# Altium PCB 388D_Control_v1_PCB1_harry.PcbDoc (part 1 of 5)
Units mil, origin at the board's own origin, x right, y up, seen from the top; angles counter-clockwise.
Board outline 4800 x 4000 mil, 6 copper layers (Top Layer, Singal Layer 2, Signal layer 3, Signal Layer 4, Signal Layer 5, Bottom Layer), stack 32.7 mil thick; 431 components, 469 nets, 2000 pads, 719 vias.
Unrouted connection lines stored in the file: 971.
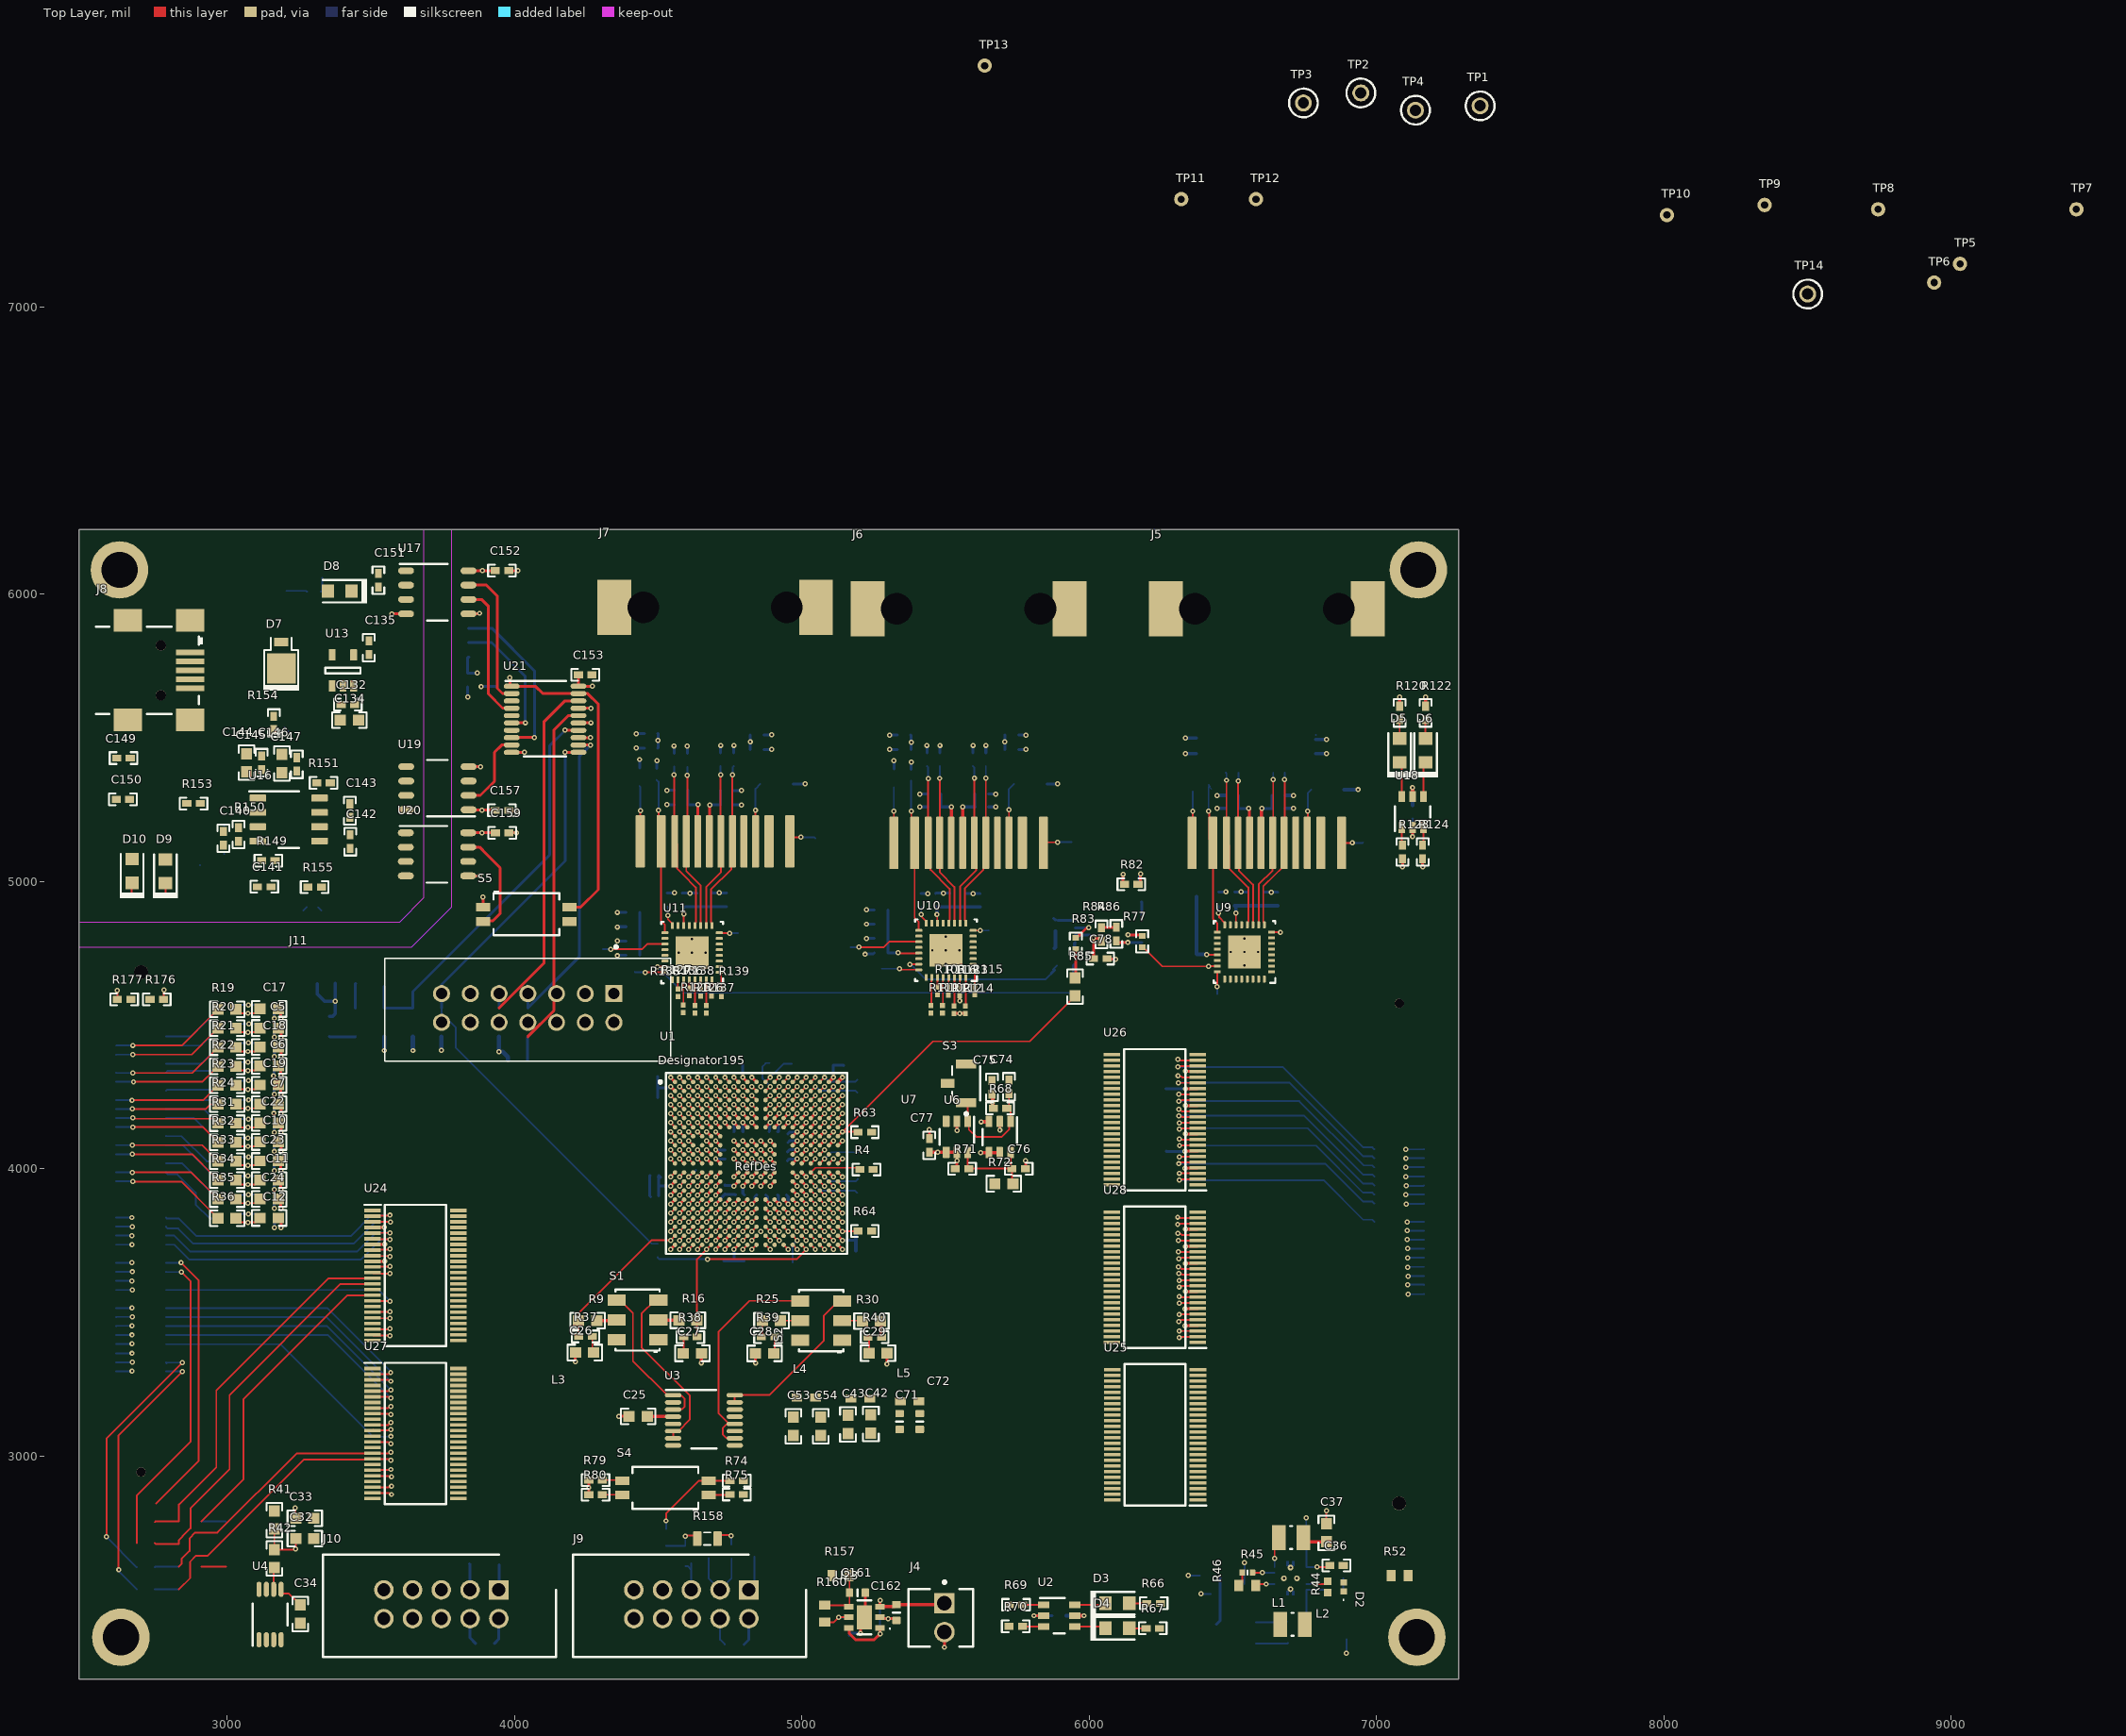
[diagram p0: Top Layer view]
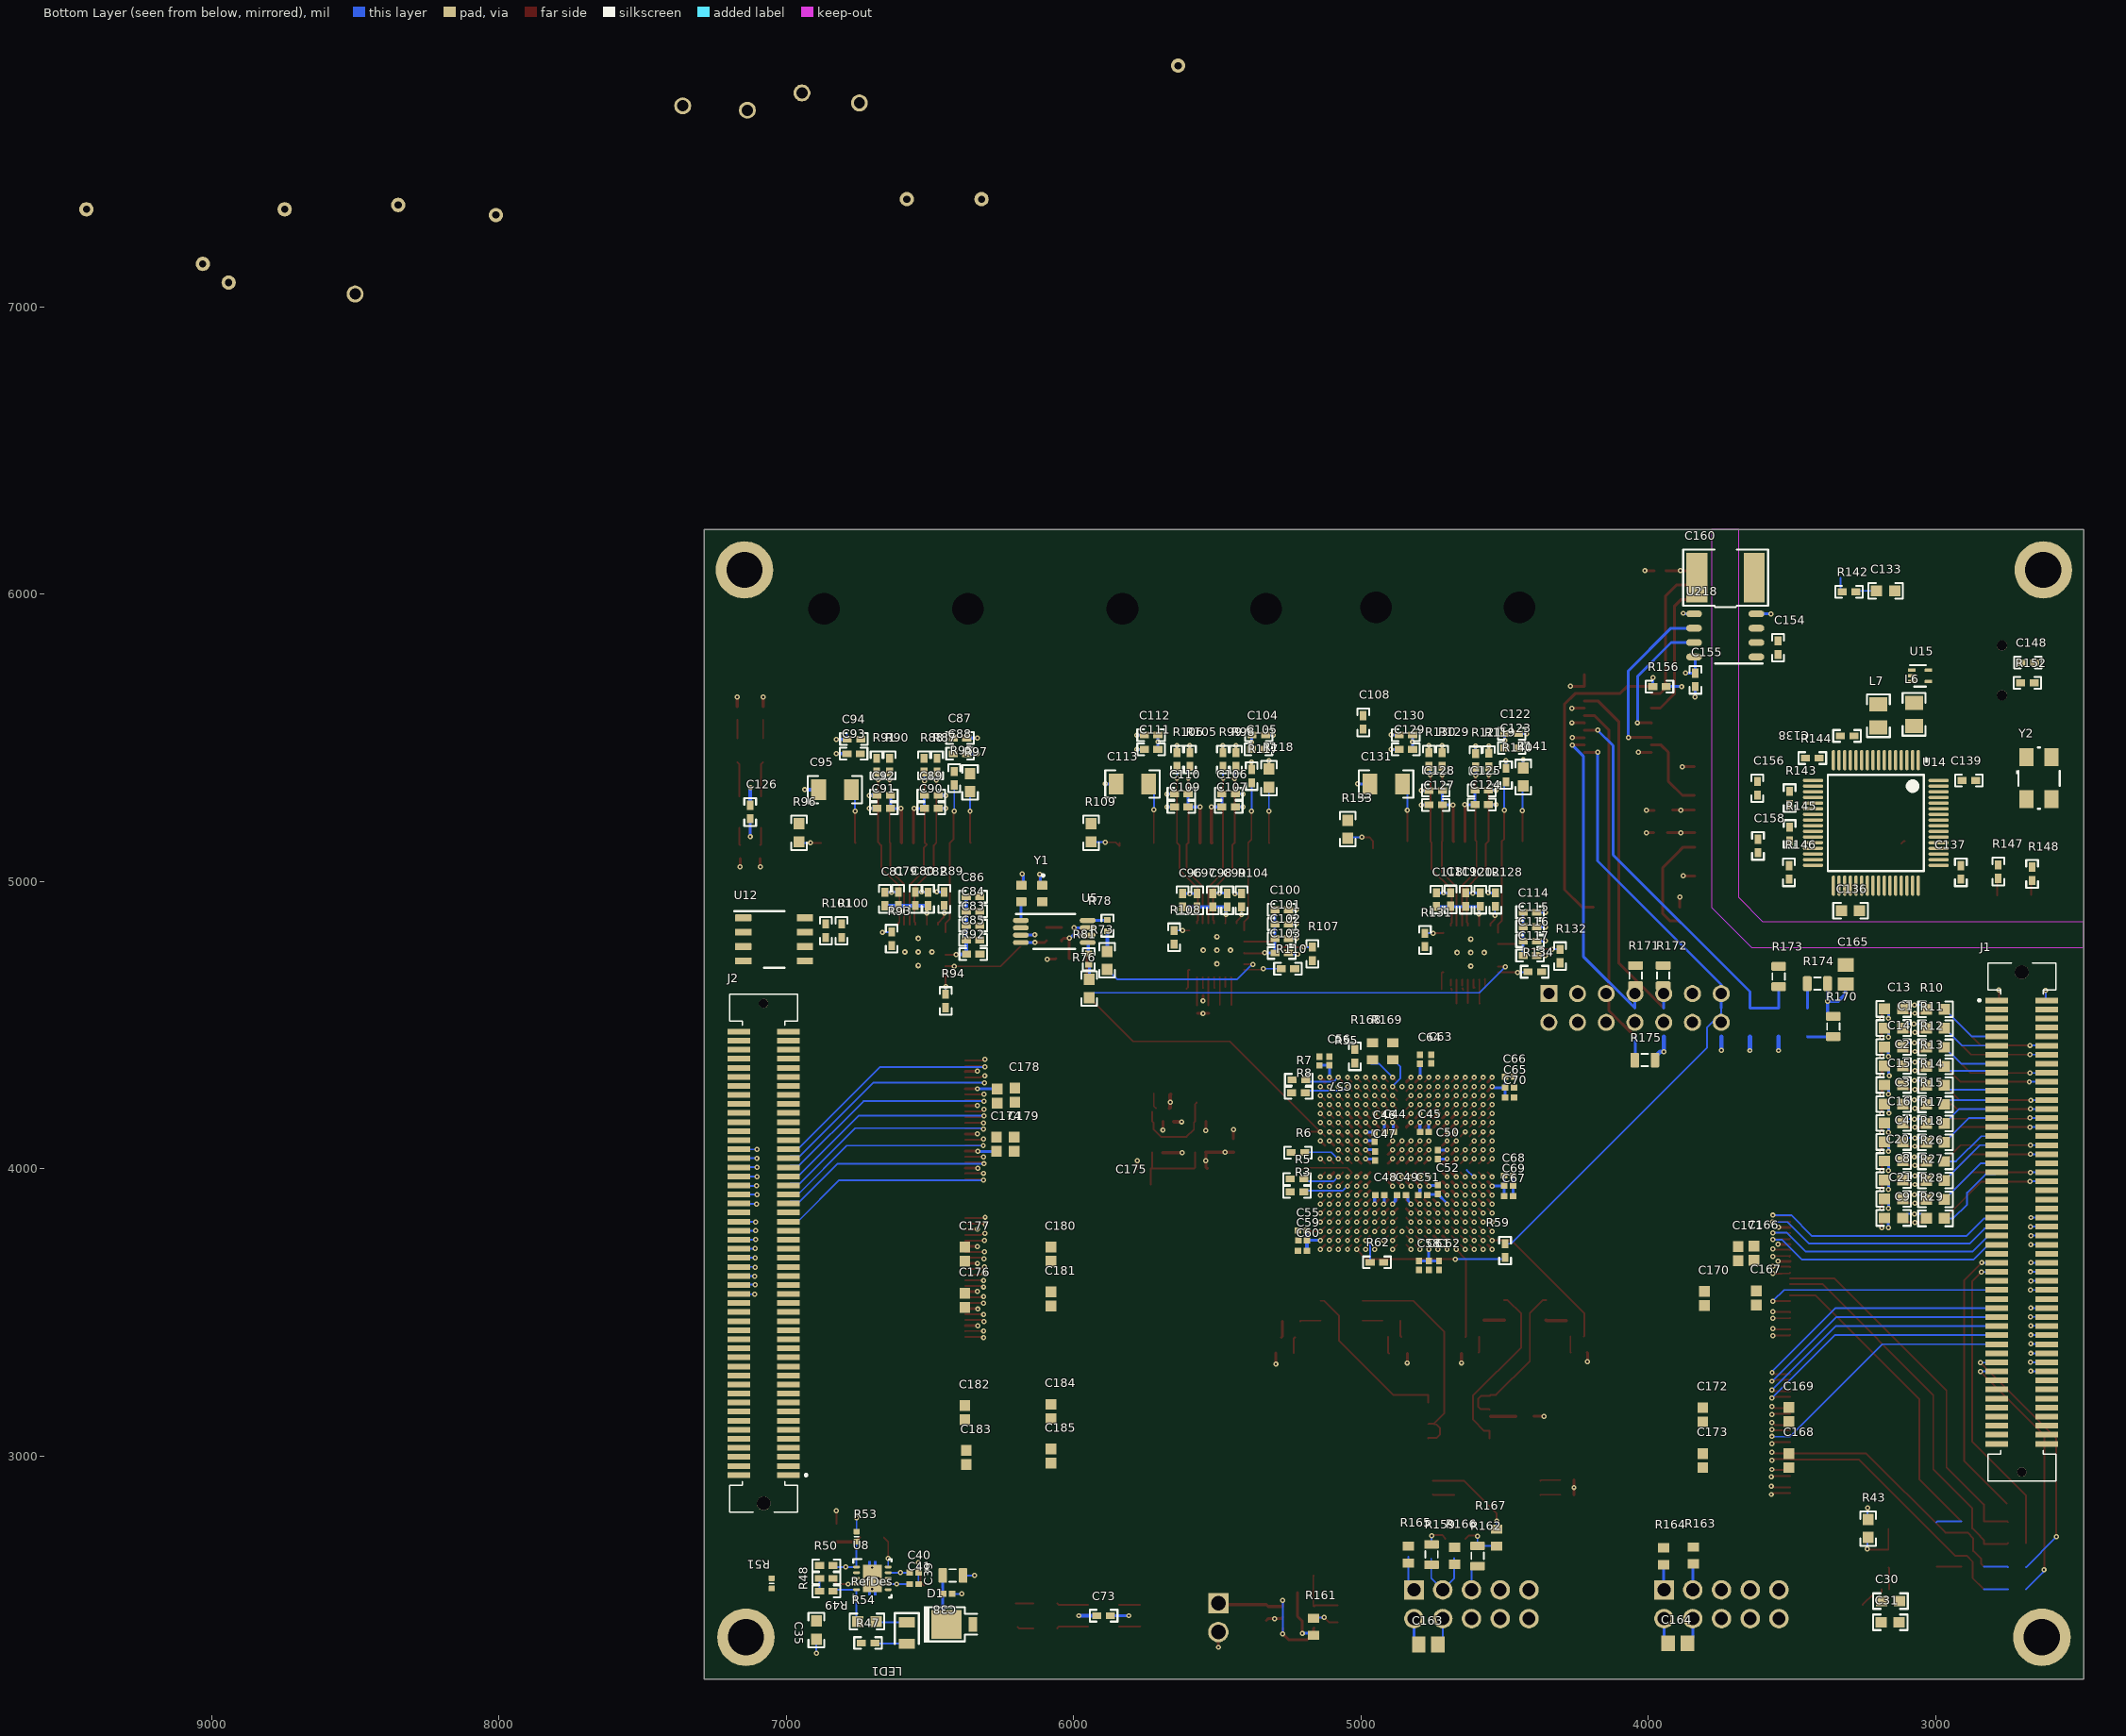
[diagram p1: Bottom Layer view, seen from below]
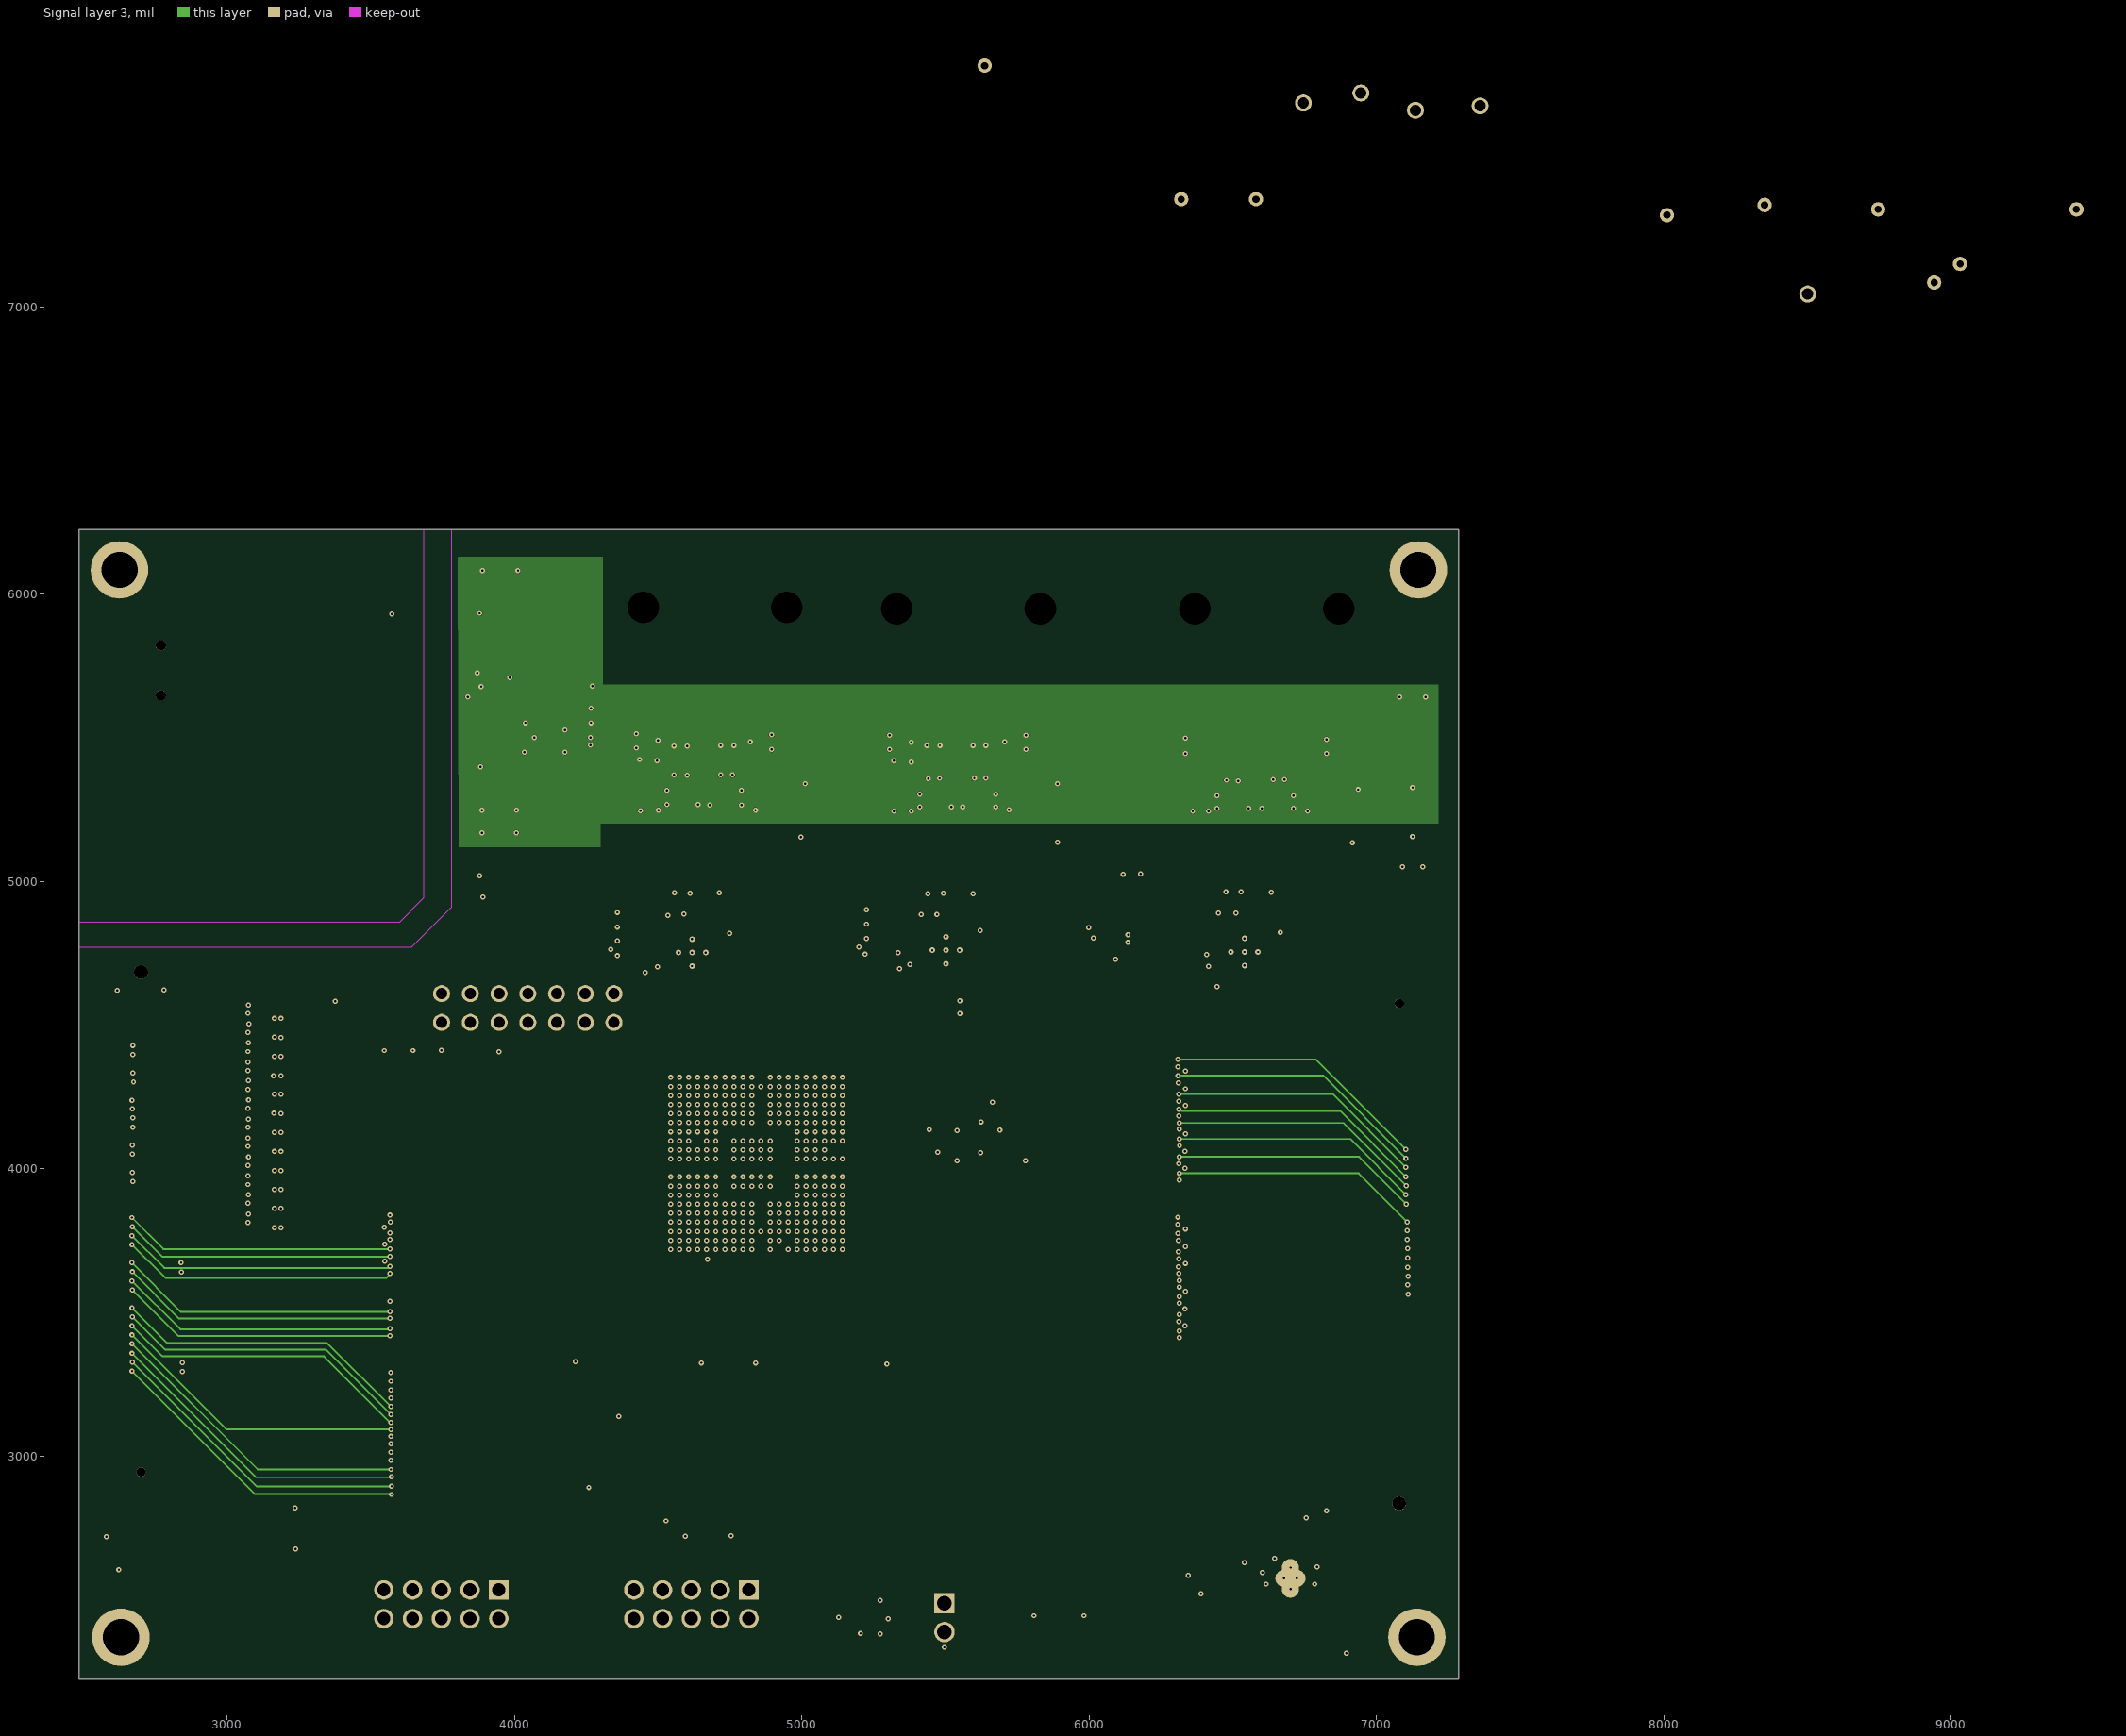
[diagram p2: Signal layer 3]

## Layer stack, top to bottom
Top Solder: solder mask 0.8, Solder Resist, Dk 3.5
Top Layer: signal copper 1.45
Dielectric 1: prepreg 5, FR-4, Dk 4.1
Singal Layer 2: signal copper 1.2
Dielectric 2: core 5, FR-4, Dk 4.1
Signal layer 3: signal copper 1.2
Dielectric 3: prepreg 5, FR-4, Dk 4.8
Signal Layer 4: signal copper 1.2
Dielectric 4: core 5, FR-4, Dk 4.1
Signal Layer 5: signal copper 1.2
Dielectric 5: prepreg 5, FR-4, Dk 4.1
Bottom Layer: signal copper 1.45
Bottom Solder: solder mask 0.8, Solder Resist, Dk 3.5

## Board outline
2485,6225 2485,2225 7285,2225 7285,6225

## Design rules (kind name [scope] priority, off if disabled: settings)
Clearance [All] p1: gap=0.01 ignorepadtopadclearanceinfootprint=TRUE
DiffPairsRouting [All] p1: maxlimit=10 minlimit=10 mostfreqgap=10 toplayer_minwidth=6 toplayer_maxwidth=15 toplayer_prefwidth=6.25 midlayer1_minwidth=6 midlayer1_maxwidth=15 midlayer1_prefwidth=6.25 midlayer2_minwidth=6 midlayer2_maxwidth=15 midlayer2_prefwidth=6.25 midlayer3_minwidth=6 midlayer3_maxwidth=15 midlayer3_prefwidth=6.25 midlayer4_minwidth=6 midlayer4_maxwidth=15 midlayer4_prefwidth=6.25 bottomlayer_minwidth=6 bottomlayer_maxwidth=15 bottomlayer_prefwidth=6.25 maxuncoupledlength=500
PolygonConnect [All] p1: connectstyle=Direct reliefconductorwidth=10 reliefentries=4 polygonreliefangle="90 Angle" airgapwidth=10
RoomDefinition 8.Emulator_Interface [InComponentClass('8.Emulator_Interface')] p1: confinementstyle=ConfineIn formatcopy=TRUE lockcomponents=FALSE outline 0,0 2000,0 2000,1000 0,1000
RoomDefinition 7.Emulator [InComponentClass('7.Emulator')] p2: confinementstyle=ConfineIn formatcopy=TRUE lockcomponents=FALSE outline 0,0 2000,0 2000,1000 0,1000
RoomDefinition 6.ETCAT [InComponentClass('6.ETCAT')] p3: confinementstyle=ConfineIn formatcopy=TRUE lockcomponents=FALSE outline 0,0 2000,0 2000,1000 0,1000
RoomDefinition 5.ETH [InComponentClass('5.ETH')] p4: confinementstyle=ConfineIn formatcopy=TRUE lockcomponents=FALSE outline 0,0 2000,0 2000,1000 0,1000
RoomDefinition 4.Power [InComponentClass('4.Power')] p5: confinementstyle=ConfineIn formatcopy=TRUE lockcomponents=FALSE outline 0,0 2000,0 2000,1000 0,1000
RoomDefinition 3.ADC [InComponentClass('3.ADC')] p6: confinementstyle=ConfineIn formatcopy=TRUE lockcomponents=FALSE outline 0,0 2000,0 2000,1000 0,1000
RoomDefinition 2.Support [InComponentClass('2.Support')] p7: confinementstyle=ConfineIn formatcopy=TRUE lockcomponents=FALSE outline 0,0 2000,0 2000,1000 0,1000
RoomDefinition 1.GPIO [InComponentClass('1.GPIO')] p8: confinementstyle=ConfineIn formatcopy=TRUE lockcomponents=FALSE outline 0,0 2000,0 2000,1000 0,1000
RoutingVias [All] p1: holewidth=28 width=50 viastyle="Through Hole" minholewidth=28 minwidth=50 maxholewidth=28 maxwidth=50
SilkToSilkClearance [All] p1: silktosilkclearance=0
SolderMaskExpansion [All] p1: expansion=4 istentingtop=FALSE
SupplyNets "Schematic Supply Nets_15" [InNet('HSEC_5V0')] p1: voltage=0.000
SupplyNets "Schematic Supply Nets_14" [InNet('GND')] p2: voltage=0.000
SupplyNets "Schematic Supply Nets_6" [InNet('EZ_5V0')] p3: voltage=0.000
SupplyNets "Schematic Supply Nets_2" [InNet('EZ_3V3')] p4: voltage=0.000
SupplyNets "Schematic Supply Nets_13" [InNet('EMU_GND')] p5: voltage=0.000
SupplyNets "Schematic Supply Nets_12" [InNet('EMU_5V0')] p6: voltage=0.000
SupplyNets "Schematic Supply Nets_10" [InNet('EMU_3V3')] p7: voltage=0.000
SupplyNets "Schematic Supply Nets_9" [InNet('EMU_USB_5V0')] p8: voltage=0.000
SupplyNets "Schematic Supply Nets_8" [InNet('EMU_1V8')] p9: voltage=0.000
SupplyNets "Schematic Supply Nets_7" [InNet('3V3')] p10: voltage=0.000
SupplyNets "Schematic Supply Nets_5" [InNet('IN_5V0')] p11: voltage=0.000
SupplyNets "Schematic Supply Nets_4" [InNet('VDDA_3V3')] p12: voltage=0.000
SupplyNets "Schematic Supply Nets_3" [InNet('VDD_3V3')] p13: voltage=0.000
SupplyNets "Schematic Supply Nets_1" [InNet('1V2')] p14: voltage=0.000
SupplyNets "Schematic Supply Nets" [InNet('VDD_1V2')] p15: voltage=0.000
Width [All] p1: maxlimit=20 minlimit=4 preferedwidth=6.25 minimp=50.000000 maximp=50.000000 favimp=50.000000
28 further rules are at their usual default settings.

## Classes and differential pairs
component class 9.Pwm_Buffer: C166 C167 C168 C169 C170 C171 C172 C173 C174 C175 C176 C177 C178 C179 C180 C181 C182 C183 C184 C185 U24 U25 U26 U27 U28
component class 8.Emulator_Interface: C151 C152 C153 C154 C155 C156 C157 C158 C159 C160 C165 J11 R156 R170 R171 R172 R173 R174 R175 S5 U17 U19 U20 U21 U218
component class 7.Emulator: C132 C133 C134 C135 C136 C137 C138 C139 C140 C141 C142 C143 C144 C145 C146 C147 C148 C149 C150 D7 D8 D9 D10 J8 L6 L7 R142 R143 R144 R145 R146 R147 R148 R149 R150 R151 R152 R153 R154 R155 TP11 TP12 TP13 U13 U14 U15 U16 Y2
component class 6.ETCAT: C96 C97 C98 C99 C100 C101 C102 C103 C104 C105 C106 C107 C108 C109 C110 C111 C112 C113 C114 C115 C116 C117 C118 C119 C120 C121 C122 C123 C124 C125 C126 C127 C128 C129 C130 C131 D5 D6 J6 J7 R98 R99 R100 R101 R102 R103 R104 R105 R106 R107 R108 R109 R110 R111 R112 R113 R114 R115 R116 R117 R118 R119 R120 R121 R122 R123 R124 R125 R126 R127 R128 R129 R130 R131 R132 R133 R134 R135 R136 R137 R138 R139 R140 R141 U10 U11 U12 U18
component class 5.ETH: C79 C80 C81 C82 C83 C84 C85 C86 C87 C88 C89 C90 C91 C92 C93 C94 C95 J5 R87 R88 R89 R90 R91 R92 R93 R94 R95 R96 R97 U9
component class 3.ADC: C1 C2 C3 C4 C5 C6 C7 C8 C9 C10 C11 C12 C13 C14 C15 C16 C17 C18 C19 C20 C21 C22 C23 C24 C25 C26 C27 C28 C29 C30 C31 C32 C33 C34 R9 R10 R11 R12 R13 R14 R15 R16 R17 R18 R19 R20 R21 R22 R23 R24 R25 R26 R27 R28 R29 R30 R31 R32 R33 R34 R35 R36 R37 R38 R39 R40 R41 R42 R43 S1 S2 U1 U3 U4
component class 2.Support: C73 C74 C75 C76 C77 C78 D3 D4 R59 R62 R63 R64 R66 R67 R68 R69 R70 R71 R72 R73 R74 R75 R76 R77 R78 R79 R80 R81 R82 R83 R84 R85 R86 S3 S4 TP5 TP6 TP7 TP8 TP9 TP10 U2 U5 U6 U7 Y1
component class 1.GPIO: C161 C162 C163 C164 J1 J2 J4 J9 J10 R3 R4 R5 R6 R7 R8 R157 R158 R159 R160 R161 R162 R163 R164 R165 R166 R167 R168 R169 R176 R177 TP14 U23
component class 4.Power: C35 C36 C37 C38 C39 C40 C41 C42 C43 C44 C45 C46 C47 C48 C49 C50 C51 C52 C53 C54 C55 C56 C57 C58 C59 C60 C61 C62 C63 C64 C65 C66 C67 C68 C69 C70 C71 C72 D1 D2 L1 L2 L3 L4 L5 LED1 R44 R45 R46 R47 R48 R49 R50 R51 R52 R53 R54 R55 TP1 TP2 TP3 TP4 U8
differential pair TD: +TD_P -TD_N
differential pair RD: +RD_P -RD_N
differential pair P1_TD: +P1_TD_P -P1_TD_N
differential pair P1_RD: +P1_RD_P -P1_RD_N
differential pair P0_TD: +P0_TD_P -P0_TD_N
differential pair P0_RD: +P0_RD_P -P0_RD_N
differential pair D4D5: +D4D5_P -D4D5_N
differential pair D2D3: +D2D3_P -D2D3_N
differential pair D0D1: +D0D1_P -D0D1_N
differential pair C4C5: +C4C5_P -C4C5_N
differential pair C2C3: +C2C3_P -C2C3_N
differential pair B4B5: +B4B5_P -B4B5_N
differential pair B2B3: +B2B3_P -B2B3_N
differential pair B0B1: +B0B1_P -B0B1_N
differential pair ADC_IN1415: +ADC_IN1415_P -ADC_IN1415_N
differential pair ADC_D4D5: +ADC_D4D5_P -ADC_D4D5_N
differential pair ADC_D2D3: +ADC_D2D3_P -ADC_D2D3_N
differential pair ADC_D0D1: +ADC_D0D1_P -ADC_D0D1_N
differential pair ADC_C4C5: +ADC_C4C5_P -ADC_C4C5_N
differential pair ADC_C2C3: +ADC_C2C3_P -ADC_C2C3_N
differential pair ADC_B4B5: +ADC_B4B5_P -ADC_B4B5_N
differential pair ADC_B2B3: +ADC_B2B3_P -ADC_B2B3_N
differential pair ADC_B0B1: +ADC_B0B1_P -ADC_B0B1_N
differential pair ADC_A4A5: +ADC_A4A5_P -ADC_A4A5_N
differential pair ADC_A2A3: +ADC_A2A3_P -ADC_A2A3_N
differential pair ADC_A0A1: +ADC_A0A1_P -ADC_A0A1_N
differential pair A4A5: +A4A5_P -A4A5_N
differential pair A2A3: +A2A3_P -A2A3_N
differential pair A0A1: +A0A1_P -A0A1_N
differential pair 1415: +1415_P -1415_N

## Components (designator, comment, footprint, x,y, rotation, side; value= is the part's Value field where it differs from the comment)
C1 "C0603C331J5GACTU" 0603 3146.2,4490.56 r0 bottom value=330pF
C2 "C0603C331J5GACTU" 0603 3146.2,4358.3 r0 bottom value=330pF
C3 "C0603C331J5GACTU" 0603 3146.2,4226.04 r0 bottom value=330pF
C4 "C0603C331J5GACTU" 0603 3146.2,4093.77 r0 bottom value=330pF
C5 "C0603C331J5GACTU" 0603 3146.2,4490.56 r0 top value=330pF
C6 "C0603C331J5GACTU" 0603 3146.2,4358.3 r0 top value=330pF
C7 "C0603C331J5GACTU" 0603 3146.2,4226.04 r0 top value=330pF
C8 "C0603C331J5GACTU" 0603 3146.2,3961.51 r0 bottom value=330pF
C9 "C0603C331J5GACTU" 0603 3146.2,3829.24 r0 bottom value=330pF
C10 "C0603C331J5GACTU" 0603 3146.2,4093.77 r0 top value=330pF
C11 "C0603C331J5GACTU" 0603 3146.2,3961.51 r0 top value=330pF
C12 "C0603C331J5GACTU" 0603 3146.2,3829.24 r0 top value=330pF
C13 "C0603C331J5GACTU" 0603 3146.2,4556.7 r0 bottom value=330pF
C14 "C0603C331J5GACTU" 0603 3146.2,4424.43 r0 bottom value=330pF
C15 "C0603C331J5GACTU" 0603 3146.2,4292.17 r0 bottom value=330pF
C16 "C0603C331J5GACTU" 0603 3146.2,4159.9 r0 bottom value=330pF
C17 "C0603C331J5GACTU" 0603 3146.2,4556.7 r0 top value=330pF
C18 "C0603C331J5GACTU" 0603 3146.2,4424.43 r0 top value=330pF
C19 "C0603C331J5GACTU" 0603 3146.2,4292.17 r0 top value=330pF
C20 "C0603C331J5GACTU" 0603 3146.2,4027.64 r0 bottom value=330pF
C21 "C0603C331J5GACTU" 0603 3146.2,3895.38 r0 bottom value=330pF
C22 "C0603C331J5GACTU" 0603 3146.2,4159.9 r0 top value=330pF
C23 "C0603C331J5GACTU" 0603 3146.2,4027.64 r0 top value=330pF
C24 "C0603C331J5GACTU" 0603 3146.2,3895.38 r0 top value=330pF
C25 "C0603C104K8RACTU" 0603 4430,3139 r0 top value=0.1uF
C26 "GRM188R61A226ME15D" 0603 4244,3361 r180 top value=22uF
C27 "GRM188R61A226ME15D" 0603 4619,3358 r0 top value=22uF
C28 "GRM188R61A226ME15D" 0603 4870,3358 r180 top value=22uF
C29 "GRM188R61A226ME15D" 0603 5265,3359 r0 top value=22uF
C30 "C0603C104K8RACTU" 0603 3156.89,2496 r0 bottom value=0.1uF
C31 "C0603C225K9PACTU" 0603 3157.89,2422 r0 bottom value=2.2uF
C32 "C0603C105Z9VACTU" 0603 3270,2713 r0 top value=1uF
C33 "C0603C105Z9VACTU" 0603 3270,2784 r0 top value=1uF
C34 "C0603C105Z9VACTU" 0603 3254,2450.5 r270 top value=1uF
C35 "GRM188R61A226ME15D" 0603 6895,2395 r270 bottom value=22uF
C36 "885012005043" 0402 6860,2620 r180 top value=33pF
C37 "GRM188R61A226ME15D" 0603 6825,2733.5 r90 top value=22uF
C38 "Capacitor 0.1 uF +/- 5% 16 V 0402" CAPC1005X56X25LL10T15 6438,2521 r0 bottom value=0.1uF/C0402
C39 "Capacitor 22µF +/-40% 16V 0805" CAPC0805(2012)145_L 6420,2585 r0 bottom value=22µF/C0805
C40 "Capacitor 0.1 uF +/- 5% 16 V 0402" CAPC1005X56X25LL10T15 6555,2595 r0 bottom value=0.1uF/C0402
C41 "Capacitor 0.1 uF +/- 5% 16 V 0402" CAPC1005X56X25LL10T15 6555,2555 r0 bottom value=0.1uF/C0402
C42 "C0603C225K8PACTU" 0603 5240,3112.5 r270 top value=2.2uF
C43 "C0603C225K8PACTU" 0603 5160,3111 r270 top value=2.2uF
C44 "Capacitor 0.1 uF +/- 5% 16 V 0402" CAPC1005X56X25LL10T15 4900.65,4129 r180 bottom value=0.1uF/C0402
C45 "Capacitor 0.1 uF +/- 5% 16 V 0402" CAPC1005X56X25LL10T15 4779,4129 r0 bottom value=0.1uF/C0402
C46 "Capacitor 0.1 uF +/- 5% 16 V 0402" CAPC1005X56X25LL10T15 4952,4111 r90 bottom value=0.1uF/C0402
C47 "Capacitor 0.1 uF +/- 5% 16 V 0402" CAPC1005X56X25LL10T15 4951,4045 r90 bottom value=0.1uF/C0402
C48 "Capacitor 0.1 uF +/- 5% 16 V 0402" CAPC1005X56X25LL10T15 4934,3909 r0 bottom value=0.1uF/C0402
C49 "Capacitor 0.1 uF +/- 5% 16 V 0402" CAPC1005X56X25LL10T15 4858,3909 r180 bottom value=0.1uF/C0402
C50 "Capacitor 0.1 uF +/- 5% 16 V 0402" CAPC1005X56X25LL10T15 4732,4050 r270 bottom value=0.1uF/C0402
C51 "Capacitor 0.1 uF +/- 5% 16 V 0402" CAPC1005X56X25LL10T15 4785,3909 r180 bottom value=0.1uF/C0402
C52 "Capacitor 0.1 uF +/- 5% 16 V 0402" CAPC1005X56X25LL10T15 4732,3928 r270 bottom value=0.1uF/C0402
C53 "C0603C225K8PACTU" 0603 4970,3104.5 r270 top value=2.2uF
C54 "C0603C225K8PACTU" 0603 5065,3104.5 r270 top value=2.2uF
C55 "Capacitor 0.1 uF +/- 5% 16 V 0402" CAPC1005X56X25LL10T15 5203,3786 r180 bottom value=0.1uF/C0402
C56 "Capacitor 0.1 uF +/- 5% 16 V 0402" CAPC1005X56X25LL10T15 5109,4376 r270 bottom value=0.1uF/C0402
C57 "Capacitor 0.1 uF +/- 5% 16 V 0402" CAPC1005X56X25LL10T15 5144.78,4375.54 r270 bottom value=0.1uF/C0402
C58 "Capacitor 0.1 uF +/- 5% 16 V 0402" CAPC1005X56X25LL10T15 4798,3664.35 r90 bottom value=0.1uF/C0402
C59 "Capacitor 0.1 uF +/- 5% 16 V 0402" CAPC1005X56X25LL10T15 5202.43,3750.9 r180 bottom value=0.1uF/C0402
C60 "Capacitor 0.1 uF +/- 5% 16 V 0402" CAPC1005X56X25LL10T15 5203,3715 r180 bottom value=0.1uF/C0402
C61 "Capacitor 0.1 uF +/- 5% 16 V 0402" CAPC1005X56X25LL10T15 4763,3664 r90 bottom value=0.1uF/C0402
C62 "Capacitor 0.1 uF +/- 5% 16 V 0402" CAPC1005X56X25LL10T15 4728,3663.65 r90 bottom value=0.1uF/C0402
C63 "Capacitor 0.1 uF +/- 5% 16 V 0402" CAPC1005X56X25LL10T15 4755.78,4382.54 r270 bottom value=0.1uF/C0402
C64 "Capacitor 0.1 uF +/- 5% 16 V 0402" CAPC1005X56X25LL10T15 4794,4382 r270 bottom value=0.1uF/C0402
C65 "Capacitor 0.1 uF +/- 5% 16 V 0402" CAPC1005X56X25LL10T15 4482,4283 r0 bottom value=0.1uF/C0402
C66 "Capacitor 0.1 uF +/- 5% 16 V 0402" CAPC1005X56X25LL10T15 4482.43,4320.9 r0 bottom value=0.1uF/C0402
C67 "Capacitor 0.1 uF +/- 5% 16 V 0402" CAPC1005X56X25LL10T15 4486,3906 r0 bottom value=0.1uF/C0402
C68 "Capacitor 0.1 uF +/- 5% 16 V 0402" CAPC1005X56X25LL10T15 4486.43,3976.9 r0 bottom value=0.1uF/C0402
C69 "Capacitor 0.1 uF +/- 5% 16 V 0402" CAPC1005X56X25LL10T15 4486,3941 r0 bottom value=0.1uF/C0402
C70 "Capacitor 0.1 uF +/- 5% 16 V 0402" CAPC1005X56X25LL10T15 4482,4248 r0 bottom value=0.1uF/C0402
C71 "Capacitor 10µF +/-20% 10V 0603" CAPC0603(1608)100_L 5340,3121 r90 top value=10µF/C0603
C72 "Capacitor 10µF +/-20% 10V 0603" CAPC0603(1608)100_L 5410,3121 r90 top value=10µF/C0603
C73 "CL05B104KP5NNNC" 0402 5895,2445 r180 bottom value=0.1uF
C74 "C0402C103J5RACTU" 0402 5720.4,4285.87 r90 top value=0.01uF
C75 "CL05B104KP5NNNC" 0402 5661.4,4283.87 r90 top value=0.1uF
C76 "C0402C103J5RACTU" 0402 5754.4,4000.87 r0 top value=0.01uF
C77 "CL05B104KP5NNNC" 0402 5443.54,4081.87 r90 top value=0.1uF
C78 "CL05B104KP5NNNC" 0402 6038,4732 r0 top value=0.1uF
C79 "CL05A106MQ5NUNC" 0402 6610,4940 r90 bottom value=10uF
C80 "EMK105BJ105KVHF" 0402 6550,4940 r90 bottom value=1uF
C81 "LMK105BJ104KV-F" 0402 6656.06,4939.68 r90 bottom value=0.1uF
C82 "885012205031" 0402 6506.06,4939.68 r90 bottom value=0.01uF
C83 "885012205031" 0402 6349.44,4847.06 r180 bottom value=0.01uF
C84 "LMK105BJ104KV-F" 0402 6349.44,4897.06 r180 bottom value=0.1uF
C85 "EMK105BJ105KVHF" 0402 6349.44,4797.06 r180 bottom value=1uF
C86 "CL05A106MQ5NUNC" 0402 6349.44,4947.06 r180 bottom value=10uF
C87 "LMK105BJ104KV-F" 0402 6395,5500 r180 bottom value=0.1uF
C88 "EMK105BJ105KVHF" 0402 6395,5445 r180 bottom value=1uF
C89 "EMK105BJ105KVHF" 0402 6495,5300 r0 bottom value=1uF
C90 "LMK105BJ104KV-F" 0402 6495,5255 r0 bottom value=0.1uF
C91 "EMK105BJ105KVHF" 0402 6660,5255 r180 bottom value=1uF
C92 "LMK105BJ104KV-F" 0402 6660,5300 r180 bottom value=0.1uF
C93 "LMK105BJ104KV-F" 0402 6765,5445 r0 bottom value=0.1uF
C94 "EMK105BJ105KVHF" 0402 6764.12,5496 r0 bottom value=1uF
C95 "12061C472KAT2A" 1206 6830,5320 r180 bottom value=4700pF
C96 "CL05A106MQ5NUNC" 0402 5620,4935 r90 bottom value=10uF
C97 "EMK105BJ105KVHF" 0402 5570,4935 r90 bottom value=1uF
C98 "LMK105BJ104KV-F" 0402 5515,4935 r90 bottom value=0.1uF
C99 "885012205031" 0402 5465,4935 r90 bottom value=0.01uF
C100 "885012205031" 0402 5275.38,4902 r180 bottom value=0.01uF
C101 "LMK105BJ104KV-F" 0402 5275.38,4852 r180 bottom value=0.1uF
C102 "EMK105BJ105KVHF" 0402 5275.38,4802 r180 bottom value=1uF
C103 "CL05A106MQ5NUNC" 0402 5275.38,4752 r180 bottom value=10uF
C104 "LMK105BJ104KV-F" 0402 5355,5510 r180 bottom value=0.1uF
C105 "EMK105BJ105KVHF" 0402 5356.38,5460 r180 bottom value=1uF
C106 "EMK105BJ105KVHF" 0402 5460,5305 r0 bottom value=1uF
C107 "LMK105BJ104KV-F" 0402 5460,5260 r0 bottom value=0.1uF
C108 "CL05B104KP5NNNC" 0402 4992,5554 r90 bottom value=0.1uF
C109 "EMK105BJ105KVHF" 0402 5625,5260 r180 bottom value=1uF
C110 "LMK105BJ104KV-F" 0402 5625,5305 r180 bottom value=0.1uF
C111 "LMK105BJ104KV-F" 0402 5730,5460 r0 bottom value=0.1uF
C112 "EMK105BJ105KVHF" 0402 5730,5510 r0 bottom value=1uF
C113 "12061C472KAT2A" 1206 5795,5340 r180 bottom value=4700pF
C114 "CL05A106MQ5NUNC" 0402 4411.62,4893 r180 bottom value=10uF
C115 "EMK105BJ105KVHF" 0402 4411.62,4843 r180 bottom value=1uF
C116 "LMK105BJ104KV-F" 0402 4411.62,4793 r180 bottom value=0.1uF
C117 "885012205031" 0402 4411.62,4743 r180 bottom value=0.01uF
C118 "885012205031" 0402 4737,4937 r90 bottom value=0.01uF
C119 "LMK105BJ104KV-F" 0402 4688,4938 r90 bottom value=0.1uF
C120 "EMK105BJ105KVHF" 0402 4635,4937 r90 bottom value=1uF
C121 "CL05A106MQ5NUNC" 0402 4584,4937 r90 bottom value=10uF
C122 "LMK105BJ104KV-F" 0402 4475,5515 r180 bottom value=0.1uF
C123 "EMK105BJ105KVHF" 0402 4475,5465 r180 bottom value=1uF
C124 "EMK105BJ105KVHF" 0402 4579.38,5268 r0 bottom value=1uF
C125 "LMK105BJ104KV-F" 0402 4579.38,5318 r0 bottom value=0.1uF
C126 "CL05B104KP5NNNC" 0402 7125,5242 r270 bottom value=0.1uF
C127 "EMK105BJ105KVHF" 0402 4739.38,5267 r180 bottom value=1uF
C128 "LMK105BJ104KV-F" 0402 4739.38,5317 r180 bottom value=0.1uF
C129 "LMK105BJ104KV-F" 0402 4843.62,5460 r0 bottom value=0.1uF
C130 "EMK105BJ105KVHF" 0402 4843.62,5510 r0 bottom value=1uF
C131 "12061C472KAT2A" 1206 4912,5340 r180 bottom value=4700pF
C132 "CL05B104KP5NNNC" 0402 3420,5616 r0 top value=0.1uF
C133 "C0603C475K9PACTU" 0603 3174,6012 r180 bottom value=4.7uF
C134 "C0603C475K9PACTU" 0603 3425,5562 r180 top value=4.7uF
C135 "0402ZC103KAT2A" 0402 3493,5814 r270 top value=0.01uF
C136 "C0603C475K9PACTU" 0603 3296,4899 r180 bottom value=4.7uF
C137 "CL05B104KP5NNNC" 0402 2912,5032 r90 bottom value=0.1uF
C138 "CL05B104KP5NNNC" 0402 3308,5507 r180 bottom value=0.1uF
C139 "CL05B104KP5NNNC" 0402 2884,5352 r0 bottom value=0.1uF
C140 "CL05B104KP5NNNC" 0402 2987,5151 r90 top value=0.1uF
C141 "CL05B104KP5NNNC" 0402 3129,4982 r0 top value=0.1uF
C142 "CL05B104KP5NNNC" 0402 3428,5139 r270 top value=0.1uF
C143 "CL05B104KP5NNNC" 0402 3427,5247 r90 top value=0.1uF
C144 "C0603C475K9PACTU" 0603 3067,5414 r270 top value=4.7uF
C145 "CL05B104KP5NNNC" 0402 3120,5414 r90 top value=0.1uF
C146 "C0603C475K9PACTU" 0603 3190,5411 r270 top value=4.7uF
C147 "CL05B104KP5NNNC" 0402 3242,5408 r90 top value=0.1uF
C148 "CGA2B2X7R1H332K050BA" 0402 2679,5762 r180 bottom value=3300pF
C149 "C0402C270J5GACTU" 0402 2639,5430 r0 top value=27pF
C150 "C0402C270J5GACTU" 0402 2637,5286 r180 top value=27pF
C151 "CL05B104KP5NNNC" 0402 3526,6049 r90 top value=0.1uF
C152 "CL05B104KP5NNNC" 0402 3956,6082.38 r0 top value=0.1uF
C153 "CL05B104KP5NNNC" 0402 4246,5720 r180 top value=0.1uF
C154 "CL05B104KP5NNNC" 0402 3548,5814 r270 bottom value=0.1uF
C155 "CL05B104KP5NNNC" 0402 3836,5702 r270 bottom value=0.1uF
C156 "CL05B104KP5NNNC" 0402 3620,5325 r270 bottom value=0.1uF
C157 "CL05B104KP5NNNC" 0402 3956,5248 r0 top value=0.1uF
C158 "CL05B104KP5NNNC" 0402 3618,5124 r90 bottom value=0.1uF
C159 "CL05B104KP5NNNC" 0402 3957,5170 r0 top value=0.1uF
C160 "C1812C100JHGACTU" 1812_180 3731,6058 r180 bottom value=10pF
C161 "Capacitor 4.7µF +/-20% 10V 0603" CAPC0603(1608)100_L 5193,2525 r0 top value=2.2uF/1608
C162 "2.2uF/2012" CAPC0603(1608)100_L 5329,2456 r270 top value=2.2uF/1608
C163 "C2012" CAPC2013X135X45NL10T25 4765,2345 r0 bottom value=0.1uF/0805
C164 "C2012" CAPC2013X135X45NL10T25 3897,2349 r0 bottom value=0.1uF/0805
C165 "C2012" CAPC2013X135X45NL10T25 3313,4677 r90 bottom value=10µF/2012
C166 "Capacitor 100 nF +/-10% 50 V 0603" CAPC1608X90X40NL10T20 3632,3707 r270 bottom value=0.1uF/C0603/50V
C167 "Capacitor 100 nF +/-10% 50 V 0603" CAPC1608X90X40NL10T20 3624,3551.39 r90 bottom value=0.1uF/C0603/50V
C168 "Capacitor 100 nF +/-10% 50 V 0603" CAPC1608X90X40NL10T20 3510,2985 r90 bottom value=0.1uF/C0603/50V
C169 "Capacitor 100 nF +/-10% 50 V 0603" CAPC1608X90X40NL10T20 3510,3145 r270 bottom value=0.1uF/C0603/50V
C170 "Capacitor 100 nF +/-10% 50 V 0603" CAPC1608X90X40NL10T20 3804,3549 r90 bottom value=0.1uF/C0603/50V
C171 "Capacitor 100 nF +/-10% 50 V 0603" CAPC1608X90X40NL10T20 3687,3705 r270 bottom value=0.1uF/C0603/50V
C172 "Capacitor 100 nF +/-10% 50 V 0603" CAPC1608X90X40NL10T20 3810,3144.61 r270 bottom value=0.1uF/C0603/50V
C173 "Capacitor 100 nF +/-10% 50 V 0603" CAPC1608X90X40NL10T20 3810,2985 r90 bottom value=0.1uF/C0603/50V
C174 "Capacitor 100 nF +/-10% 50 V 0603" CAPC1608X90X40NL10T20 6268,4086 r90 bottom value=0.1uF/C0603/50V
C175 "Capacitor 100 nF +/-10% 50 V 0603" CAPC1608X90X40NL10T20 6266,4254 r270 bottom value=0.1uF/C0603/50V
C176 "Capacitor 100 nF +/-10% 50 V 0603" CAPC1608X90X40NL10T20 6378,3543 r90 bottom value=0.1uF/C0603/50V
C177 "Capacitor 100 nF +/-10% 50 V 0603" CAPC1608X90X40NL10T20 6378,3703 r270 bottom value=0.1uF/C0603/50V
C178 "Capacitor 100 nF +/-10% 50 V 0603" CAPC1608X90X40NL10T20 6204,4257 r270 bottom value=0.1uF/C0603/50V
C179 "Capacitor 100 nF +/-10% 50 V 0603" CAPC1608X90X40NL10T20 6207,4086 r90 bottom value=0.1uF/C0603/50V
C180 "Capacitor 100 nF +/-10% 50 V 0603" CAPC1608X90X40NL10T20 6078,3703 r270 bottom value=0.1uF/C0603/50V
C181 "Capacitor 100 nF +/-10% 50 V 0603" CAPC1608X90X40NL10T20 6078,3548 r90 bottom value=0.1uF/C0603/50V
C182 "Capacitor 100 nF +/-10% 50 V 0603" CAPC1608X90X40NL10T20 6378,3151.39 r270 bottom value=0.1uF/C0603/50V
C183 "Capacitor 100 nF +/-10% 50 V 0603" CAPC1608X90X40NL10T20 6373,2996 r90 bottom value=0.1uF/C0603/50V
C184 "Capacitor 100 nF +/-10% 50 V 0603" CAPC1608X90X40NL10T20 6078,3156 r270 bottom value=0.1uF/C0603/50V
C185 "Capacitor 100 nF +/-10% 50 V 0603" CAPC1608X90X40NL10T20 6078,3000.61 r90 bottom value=0.1uF/C0603/50V
D1 "CMP-004-00076-1" POWERMITE 6396.36,2415 r180 bottom value=10V
D2 "CFSH05-20L_TR" CFSH0520LTRPBFREE 6885,2545 r90 top
D3 "150080SS75000" WL-SMCW_RED_0805 6097.66,2488 r0 top value=Red
D4 "150080SS75000" WL-SMCW_RED_0805 6098,2401 r0 top value=Red
D5 "150080SS75000" WL-SMCW_RED_0805 7080,5457 r90 top value=Red
D6 "150080VS75000" WL-SMCW_Green_0805 7170,5457 r90 top value="Bright Green"
D7 "MBRM110ET1G" POWERMITE 3188,5788 r90 top value=10V
D8 "150080VS75000" WL-SMCW_Green_0805 3391.66,6011 r180 top value="Bright Green"
D9 "150080BS75000" WL-SMCW_Blue_0805 2785,5036 r90 top value=Blue
D10 "150080BS75000" WL-SMCW_Blue_0805 2669,5037 r90 top value=Blue
J1 "10144517-101802LF" AMPHENOL_10144517-101802LF 2700,3815 r90 bottom
J2 "10144517-101802LF" AMPHENOL_10144517-101802LF 7078.39,3706.34 r270 bottom
J4 "640456-2" TECO-640456-2_V 5496,2438 r90 top
J5 "7498010210A" Wurth_7498010210A 6617.8,5949.57 r90 top
J6 "7498010210A" Wurth_7498010210A 5579.76,5949.57 r90 top
J7 "7498010210A" Wurth_7498010210A 4697.8,5954.57 r90 top
J8 "65100516121" Wurth_65100516121 2536.72,5735.39 r270 top
J9 "302-S101/EasyDSP" SHDR10W66P254_2X5_2030X905X905P 4815,2535 r180 top
J10 "302-S101/EasyDSP" SHDR10W66P254_2X5_2030X905X905P 3945,2535 r180 top
J11 "SBH11-PBPC-D07-ST-BK" SULLINS_SBH11-PBPC-D07-ST-BK 4046,4560 r180 top
L1 "LQM2HPN2R2MG0L" INDC2520X100X60NL20T20 6707.36,2415 r0 top value=2.2µH/L1008
L2 "LQM2HPN2R2MG0L" INDC2520X100X60NL20T20 6702.28,2717.28 r0 top value=3.3µH/L1008
L3 "BLM18AG121SN1D" MURA-BLM18-F-H1-CHIP-2_V 5203.5,3201 r180 top
L4 "BLM18AG121SN1D" MURA-BLM18-F-H1-CHIP-2_V 5015,3204.5 r0 top
L5 "BLM18AG121SN1D" MURA-BLM18-F-H1-CHIP-2_V 5375,3191 r0 top
L6 "HZ0805E601R-10" 0805_HV 3075,5582 r90 bottom value="600 ohm"
L7 "HZ0805E601R-10" 0805_HV 3199,5577 r90 bottom value="600 ohm"
LED1 "150080VS75000/D0805" LEDC2012X70N 6580,2385 r270 bottom
R3 "CRCW040239R0JNED" 0402 5222,3920 r180 bottom value=39
R4 "CRCW040239R0JNED" 0402 5224.62,3998 r180 top value=39
R5 "CRCW040239R0JNED" 0402 5222,3965 r180 bottom value=39
R6 "CRCW040239R0JNED" 0402 5219,4057 r180 bottom value=39
R7 "CRCW040239R0JNED" 0402 5216,4310 r180 bottom value=39
R8 "CRCW040239R0JNED" 0402 5217,4265 r180 bottom value=39
R9 "CRCW06030000Z0EA" 0603 4254,3472 r180 top value=0
R10 "CRCW06030000Z0EA" 0603 3000.54,4555.7 r180 bottom value=0
R11 "CRCW06030000Z0EA" 0603 3000.54,4489.52 r180 bottom value=0
R12 "CRCW06030000Z0EA" 0603 3000.54,4423.34 r180 bottom value=0
R13 "CRCW06030000Z0EA" 0603 3000.54,4357.15 r180 bottom value=0
R14 "CRCW06030000Z0EA" 0603 3000.54,4290.97 r180 bottom value=0
R15 "CRCW06030000Z0EA" 0603 3000.54,4224.79 r180 bottom value=0
R16 "CRCW06030000Z0EA" 0603 4603,3473 r0 top value=0
R17 "CRCW06030000Z0EA" 0603 3000.54,4158.61 r180 bottom value=0
R18 "CRCW06030000Z0EA" 0603 3000.54,4092.43 r180 bottom value=0
R19 "CRCW06030000Z0EA" 0603 2999.49,4555.7 r180 top value=0
R20 "CRCW06030000Z0EA" 0603 2999.49,4489.61 r180 top value=0
R21 "CRCW06030000Z0EA" 0603 2999.49,4423.52 r180 top value=0
R22 "CRCW06030000Z0EA" 0603 2999.49,4357.43 r180 top value=0
R23 "CRCW06030000Z0EA" 0603 2999.49,4291.34 r180 top value=0
R24 "CRCW06030000Z0EA" 0603 2999.49,4225.25 r180 top value=0
R25 "CRCW06030000Z0EA" 0603 4894,3472 r180 top value=0
R26 "CRCW06030000Z0EA" 0603 3000.54,4026.24 r180 bottom value=0
R27 "CRCW06030000Z0EA" 0603 3000.54,3960.06 r180 bottom value=0
R28 "CRCW06030000Z0EA" 0603 3000.54,3893.88 r180 bottom value=0
R29 "CRCW06030000Z0EA" 0603 3000.54,3827.7 r180 bottom value=0
R30 "CRCW06030000Z0EA" 0603 5242,3470 r0 top value=0
R31 "CRCW06030000Z0EA" 0603 2999.49,4159.16 r180 top value=0
R32 "CRCW06030000Z0EA" 0603 2999.49,4093.06 r180 top value=0
R33 "CRCW06030000Z0EA" 0603 2999.49,4026.97 r180 top value=0
R34 "CRCW06030000Z0EA" 0603 2999.49,3960.88 r180 top value=0
R35 "CRCW06030000Z0EA" 0603 2999.49,3894.79 r180 top value=0
R36 "CRCW06030000Z0EA" 0603 2999.49,3828.7 r180 top value=0
R37 "ERJ2BWFR100X" 0402 4247,3417 r0 top value=0.1
R38 "ERJ2BWFR100X" 0402 4612,3415 r180 top value=0.1
R39 "ERJ2BWFR100X" 0402 4882,3415 r0 top value=0.1
R40 "ERJ2BWFR100X" 0402 5253,3414 r180 top value=0.1
R41 "CRCW06030000Z0EA" 0603 3164,2778 r270 top value=0
R42 "CRCW06030000Z0EA" 0603 3164,2644 r270 top value=0
R43 "RC0603FR-071KL" 0603 3235,2748.35 r90 bottom value=1.00k
R44 "Resistor 0R +/- 5% 0402 100 mW" RESC1005X40X25ML05T05 6830,2545 r270 top value=0/R0402
R45 "22KR2F" RESC0402(1005)_L 6550,2595 r180 top value=22k/R0402
R46 "Resistor 0R +/- 5% 0603 100 mW" RESC1608X55X25ML10T15 6550,2550 r180 top value=0/R0603
R47 "CRCW0402680RJNED" 0402 6715,2350 r0 bottom value=680
R48 "CRCW0402340KFKED" 0402 6860,2575 r180 bottom value=340k
R49 "ERJ-2RKF2001X" 0402 6860,2530 r0 bottom value=2.00k
R50 "CRCW0402205KFKED" 0402 6860,2620 r0 bottom value=205k
R51 "10KR2F" RESC0402(1005)_L 7050,2557.72 r270 bottom value=10k/R0402
R52 "Resistor 100k +/-1% 0603 100 mW" RESC1608X55X25ML10T15 7080,2585 r180 top value=100k/R0603
R53 "Resistor 200K +/-1 % 0402 63 mW" RESC0402(1005)_L 6755,2720 r270 bottom value=200k/R0402
R54 "RT0603DRE0775KL" 0603 6718.5,2425 r0 bottom value=75.0k
R55 "CRCW040256R0JNED" 0402 5021,4392 r270 bottom value=56
R59 "CRCW040239R0JNED" 0402 4498,3716 r270 bottom value=39
R62 "CRCW04022K20JNED" 0402 4944,3675 r0 bottom value=2.2k
R63 "CRCW04022K20JNED" 0402 5219,4128 r180 top value=2.2k
R64 "RC0402FR-0710KL" 0402 5219,3784 r180 top value=10.0k
R66 "CRCW0402680RJNED" 0402 6224,2488 r180 top value=680
R67 "CRCW0402680RJNED" 0402 6221,2401 r180 top value=680
R68 "CRCW04022K20JNED" 0402 5689.4,4210.87 r180 top value=2.2k
R69 "CRCW04021M50JNED" 0402 5745,2483 r180 top value=1.5Meg
R70 "CRCW04021M50JNED" 0402 5744,2408 r180 top value=1.5Meg
R71 "CRCW04022K20JNED" 0402 5557.4,4000.87 r180 top value=2.2k
R72 "CRCW06030000Z0EA" 0603 5702.7,3948.73 r180 top value=0
R73 "CRCW06030000Z0EA" 0603 5883,4726 r90 bottom value=0
R74 "CRCW040256K0JNED" 0402 4773,2915 r180 top value=56k
R75 "CRCW040256K0JNED" 0402 4773,2867 r0 top value=56k
R76 "CRCW06030000Z0EA" 0603 5945,4628 r90 bottom value=0
R77 "CPF0402B10RE1" CPF0402 6184,4792 r270 top value=10.0
R78 "CPF0402B10RE1" CPF0402 5882,4847 r270 bottom value=10.0
R79 "CRCW04022K20JNED" 0402 4282,2917 r180 top value=2.2k
R80 "CRCW04022K20JNED" 0402 4282,2866 r0 top value=2.2k
R81 "CPF0402B10RE1" CPF0402 5947,4730 r270 bottom value=10.0
R82 "CRCW04020000Z0EDHP" 0402 6146,4991 r0 top value=0
R83 "CPF0402B10RE1" CPF0402 5953,4784 r270 top value=10.0
R84 "CRCW04020000Z0EDHP" 0402 6042,4816.38 r90 top value=0
R85 "CRCW06030000Z0EA" 0603 5950,4634 r90 top value=0
R86 "CRCW04020000Z0EDHP" 0402 6094,4818 r270 top value=0
R87 "RC0402FR-0749R9L" 0402 6475,5405 r90 bottom value=49.9
R88 "RC0402FR-0749R9L" 0402 6520,5405 r90 bottom value=49.9
R89 "CRCW04024K87FKED" 0402 6450,4940 r90 bottom value=4.87k
R90 "RC0402FR-0749R9L" 0402 6640,5405 r90 bottom value=49.9
R91 "RC0402FR-0749R9L" 0402 6685,5405 r90 bottom value=49.9
R92 "CRCW04022K20JNED" 0402 6349,4748 r180 bottom value=2.2k
R93 "RC0402FR-0710KL" 0402 6632.75,4801.38 r270 bottom value=10.0k
R94 "CRCW04022K49FKED" 0402 6445,4585 r270 bottom value=2.49k
R95 "CRCW04022K20JNED" 0402 6415,5360 r90 bottom value=2.2k
R96 "CRCW0603470RJNEA" 0603 6955,5170 r270 bottom value=470
R97 "CRCW0603470RJNEA" 0603 6360,5345 r270 bottom value=470
R98 "RC0402FR-0749R9L" 0402 5435,5425 r90 bottom value=49.9
R99 "RC0402FR-0749R9L" 0402 5480,5425 r90 bottom value=49.9
R100 "CRCW04024K70JNED" 0402 6807,4829 r90 bottom value=4.7k
R101 "CRCW04024K70JNED" 0402 6862,4829 r90 bottom value=4.7k
R102 "CRCW02012K20JNED" 0201 5489,4556 r270 top value=2.2k
R103 "CRCW02012K20JNED" 0201 5471,4620 r270 top value=2.2k
R104 "CRCW04024K87FKED" 0402 5415,4935 r90 bottom value=4.87k
R105 "RC0402FR-0749R9L" 0402 5595,5425 r90 bottom value=49.9
R106 "RC0402FR-0749R9L" 0402 5640,5425 r90 bottom value=49.9
R107 "CRCW04022K20JNED" 0402 5169,4748.38 r90 bottom value=2.2k
R108 "RC0402FR-0710KL" 0402 5650,4806.38 r270 bottom value=10.0k
R109 "CRCW0603470RJNEA" 0603 5939,5170 r270 bottom value=470
R110 "CRCW04022K49FKED" 0402 5254,4697 r0 bottom value=2.49k
R111 "CRCW02012K20JNED" 0201 5449,4555 r90 top value=2.2k
R112 "CRCW02012K20JNED" 0201 5529,4554 r90 top value=2.2k
R113 "CRCW02012K20JNED" 0201 5549,4617 r90 top value=2.2k
R114 "CRCW02012K20JNED" 0201 5569,4554 r90 top value=2.2k
R115 "CRCW02012K20JNED" 0201 5602,4619 r90 top value=2.2k
R116 "CRCW02012K20JNED" 0201 5510,4618 r90 top value=2.2k
R117 "CRCW04022K20JNED" 0402 5380,5367 r90 bottom value=2.2k
R118 "CRCW0603470RJNEA" 0603 5320,5360 r270 bottom value=470
R119 "RC0402FR-0749R9L" 0402 4555,5423.38 r90 bottom value=49.9
R120 "CRCW04021K27FKED" 0402 7080,5587 r90 top value=1.27k
R121 "RC0402FR-0749R9L" 0402 4601,5422.38 r90 bottom value=49.9
R122 "CRCW0402680RJNED" 0402 7170,5587 r270 top value=680
R123 "CRCW04021M50JNED" 0402 7090,5103.38 r270 top value=1.5Meg
R124 "CRCW04021M50JNED" 0402 7160,5103.38 r270 top value=1.5Meg
R125 "CRCW02012K20JNED" 0201 4586,4557 r270 top value=2.2k
R126 "CRCW02012K20JNED" 0201 4628,4556 r270 top value=2.2k
R127 "CRCW02012K20JNED" 0201 4608,4617 r270 top value=2.2k
R128 "CRCW04024K87FKED" 0402 4531.69,4936.94 r90 bottom value=4.87k
R129 "RC0402FR-0749R9L" 0402 4717,5425 r90 bottom value=49.9
R130 "RC0402FR-0749R9L" 0402 4763,5425 r90 bottom value=49.9
R131 "RC0402FR-0710KL" 0402 4777,4797 r270 bottom value=10.0k
R132 "CRCW04022K20JNED" 0402 4307,4741 r90 bottom value=2.2k
R133 "CRCW0603470RJNEA" 0603 5046,5182.5 r270 bottom value=470
R134 "CRCW04022K49FKED" 0402 4395,4686 r0 bottom value=2.49k
R135 "CRCW02012K20JNED" 0201 4568,4613 r90 top value=2.2k
R136 "CRCW02012K20JNED" 0201 4647,4615 r90 top value=2.2k
R137 "CRCW02012K20JNED" 0201 4667,4555 r90 top value=2.2k
R138 "CRCW02012K20JNED" 0201 4686,4614 r90 top value=2.2k
R139 "CRCW02012K20JNED" 0201 4719,4613 r90 top value=2.2k
R140 "CRCW04022K20JNED" 0402 4495,5371 r90 bottom value=2.2k
R141 "CRCW0603470RJNEA" 0603 4435,5364 r270 bottom value=470
R142 "CRCW0402680RJNED" 0402 3301.38,6009 r0 bottom value=680
R143 "CRCW040210K0JNED" 0402 3508,5291 r270 bottom value=10k
R144 "CRCW04020000Z0ED" 0402 3429,5430 r0 bottom value=0
R145 "CRCW040210K0JNED" 0402 3508,5166 r90 bottom value=10k
R146 "CRCW04021K00JNED" 0402 3510,5032 r270 bottom value=1.0k
R147 "CRCW04021K00JNED" 0402 2782,5035 r270 bottom value=1.0k
R148 "CRCW04021K00JNED" 0402 2664,5027 r270 bottom value=1.0k
R149 "CRCW040210K0JNED" 0402 3143,5073 r180 top value=10k
R150 "CRCW04022K20JNED" 0402 3039,5164 r90 top value=2.2k
R151 "CRCW04021K00JNED" 0402 3335,5344 r180 top value=1.0k
R152 "CRCW04020000Z0ED" 0402 2680.38,5692 r0 bottom value=0
R153 "CRCW04020000Z0ED" 0402 2883,5272 r0 top value=0
R154 "CRCW040212K0JNED" 0402 3162,5552 r270 top value=12k
R155 "CRCW04020000Z0ED" 0402 3304,4981 r180 top value=0
R156 "CRCW040210K0JNED" 0402 3960.62,5679 r180 bottom value=10k
R157 "SHORT" RESC1608X55X25ML10T15 5135,2584 r180 top value="1608 bead"
R158 "R2012" RESC0805(2012)_L 4671,2713 r0 top value=20k/2012
R159 "R2012" RESC0805(2012)_L 4754,2658 r90 bottom value=20k/2012
R160 "Resistor 1k +/-1% 0603 100 mW" RESC1608X55X25ML10T15 5080,2452 r90 top value=32.8k/1608
R161 "Resistor 1k +/-1% 0603 100 mW" RESC1608X55X25ML10T15 5164,2406 r270 bottom value=20k/1608
R162 "R2012" RESC0805(2012)_L 4594,2653 r90 bottom value=2k/2012
R163 "Resistor 0R +/- 5% 0603 100 mW" RESC1608X55X25ML10T15 3843,2655 r270 bottom value=0/R0603
R164 "Resistor 0R +/- 5% 0603 100 mW" RESC1608X55X25ML10T15 3946,2652 r270 bottom value=0/R0603
R165 "Resistor 0R +/- 5% 0603 100 mW" RESC1608X55X25ML10T15 4834,2658 r270 bottom value=0/R0603
R166 "Resistor 0R +/- 5% 0603 100 mW" RESC1608X55X25ML10T15 4674,2653.47 r270 bottom value=0/R0603
R167 "Resistor 0R +/- 5% 0603 100 mW" RESC1608X55X25ML10T15 4527,2717 r270 bottom value=0/R0603
R168 "Resistor 0R +/- 5% 0603 100 mW" RESC1608X55X25ML10T15 4960,4409 r90 bottom value=0/R0603
R169 "Resistor 0R +/- 5% 0603 100 mW" RESC1608X55X25ML10T15 4889,4409 r90 bottom value=0/R0603
R170 "R2012" RESC0805(2012)_L 3356,4496 r90 bottom value=4.7k/2012
R171 "R2012" RESC0805(2012)_L 4044,4673 r90 bottom value=4.7k/2012
R172 "R2012" RESC0805(2012)_L 3948,4673 r90 bottom value=4.7k/2012
R173 "R2012" RESC0805(2012)_L 3546,4670 r90 bottom value=4.7k/2012
R174 "R2012" RESC0805(2012)_L 3411,4645 r180 bottom value=4.7k/2012
R175 "R2012" RESC0805(2012)_L 4012,4379 r0 bottom value=2.2k/2012
R176 "CRCW04024K70JNED" 0402 2755,4590 r180 top value=4.7k
R177 "CRCW04024K70JNED" 0402 2641.38,4590 r180 top value=4.7k
S1 "CAS-D20TA" SW_CAS-D20TA 4428,3474 r180 top
S2 "CAS-D20TA" SW_CAS-D20TA 5067,3472 r180 top
S3 "B3U-1100P" SW_B3U-1100P 5571.7,4297.73 r90 top
S4 "218-2LPST" SW_218-2LP 4525,2890 r180 top
S5 "218-2LPST" SW_218-2LP 4041,4886 r0 top
TP1 "5003" KSTN-5003 7360,7700 r0 top
TP2 "5003" KSTN-5003 6945,7745 r0 top
TP3 "5003" KSTN-5003 6745,7710 r0 top
TP4 "5003" KSTN-5003 7135,7685 r0 top
TP5 "TESTPOINT" TP_50MIL-25MILHOLE 9030,7150 r90 top
TP6 "TESTPOINT" TP_50MIL-25MILHOLE 8940,7085 r90 top
TP7 "TESTPOINT" TP_50MIL-25MILHOLE 9435,7340 r90 top
TP8 "TESTPOINT" TP_50MIL-25MILHOLE 8745,7340 r90 top
TP9 "TESTPOINT" TP_50MIL-25MILHOLE 8350,7355 r90 top
TP10 "TESTPOINT" TP_50MIL-25MILHOLE 8010,7320 r90 top
TP11 "TESTPOINT" TP_50MIL-25MILHOLE 6320,7375.24 r90 top
TP12 "TESTPOINT" TP_50MIL-25MILHOLE 6580,7375.24 r90 top
TP13 "TESTPOINT" TP_50MIL-25MILHOLE 5636,7840 r90 top
TP14 "5003" KSTN-5003 8500,7045 r90 top
U1 "TMS320F28388DZWTS" ZWT0337A-IPC_B 4841.77,4019.25 r0 top
U2 "SN74LVC2G07DBVR" DBV0006A_N 5895,2445 r0 top
U3 "OPA4350EA/250" DBQ0016A_N 4659,3125 r0 top
U4 "REF5030IDGKT" DGK0008A_N 3149,2449 r90 top
U5 "CDCLVC1104PW" PW0008A_N 6067,4826.38 r180 bottom
U6 "TPS3702CX33DDCT" DDC0006A_N 5688.4,4110.87 r270 top
U7 "TPS3702CX33DDCT" DDC0006A_N 5539.4,4111.87 r270 top
U8 "TPS62420DRCR" DRC0010J 6700,2575 r180 bottom
U9 "DP83822IRHBR" RHB0032B 6540,4755 r180 top
U10 "DP83822IRHBR" RHB0032B 5501.06,4761.06 r180 top
U11 "DP83822IRHBR" RHB0032B 4617.76,4753 r180 top
U12 "CAT24C16WI-GT3" SOIC-8 7042,4799 r180 bottom
U13 "TPS73033DBVR" DBV0005A_N 3402.6,5734.87 r90 top
U14 "FT2232HL-REEL" LQFP64_N 3207.9,5204.5 r270 bottom
U15 "TPD2E001DRLR" DRL0005A 3054,5716 r180 bottom
U16 "93LC56C-I/SN" SOIC-8 3214,5216 r0 top
U17 "ISO7220CD" D0008B_N 3731,6007 r0 top
U18 "SN74LVC2G06DBVR" DBV0006A_N 7125,5242 r90 top
U19 "ISO7220CD" D0008B_N 3731.5,5325 r180 top
U20 "ISO7220CD" D0008B_N 3730,5095 r0 top
U21 "SN74ALVC244PWR" PW0020A_N 4106,5565 r0 top
U23 "NCP606MN18T2G" NCP606MN18T2G 5217.53,2439.6 r90 top
U24 "SN74LVCH16T245DGGR" SOP50P810X120-48N 3655,3629 r0 top
U25 "SN74LVCH16T245DGGR" SOP50P810X120-48N 6228.87,3074.31 r180 top
U26 "SN74LVCH16T245DGGR" SOP50P810X120-48N 6228,4171 r180 top
U27 "SN74LVCH16T245DGGR" SOP50P810X120-48N 3655,3079 r0 top
U28 "SN74LVCH16T245DGGR" SOP50P810X120-48N 6228,3623 r180 top
U218 "ISO7220CD" D0008B_N 3732,5857 r0 bottom
Y1 "CMP-0082061-2" ECS_ECS-2520S 6145,4958.38 r270 bottom
Y2 "ECS-120-20-30B-TR" ECS_ECX-53B 2640,5360 r180 bottom

## Footprints (in the part's own frame and the unit in brackets; to place one, negate y for a bottom-side part, rotate by r counter-clockwise, add the part's x,y. Pads: shape width x height; smd on the part's side, far side on the other; paste and mask are expansions set on the pad)
0201 [mm]
  rect 0.46x0.42 smd mask+0.048: 1(-0.33,0) 2(0.33,0)
  body extent -0.31,-0.16 0.31,0.16, height 0.26
0402 [mm]
  rect 0.8x0.6 smd: 1(-0.6,0) 2(0.6,0)
  silkscreen extent -1.22,-0.52 1.22,0.52, body extent -0.55,-0.3 0.55,0.3, height 0.6
0603 [mm]
  rect 1x0.95 smd: 1(-0.8,0) 2(0.8,0)
  silkscreen extent -1.52,-0.69 1.52,0.69, body extent -0.87,-0.47 0.87,0.47, height 1
0805_HV [mil]
  rect 50x63 smd: 1(-40,0) 2(40,0)
  silkscreen extent -74,-40 74,40, body extent -43,-29 43,29, height 57
1206 [mm]
  rect 1.3x1.85 smd: 1(-1.45,0) 2(1.45,0)
  silkscreen extent -2.4,-1.21 2.4,1.21, body extent -1.7,-0.9 1.7,0.9, height 1.35
1812_180 [mm]
  rect 1.85x4.36 smd: 1(-2.53,0) 2(2.53,0)
  silkscreen extent -3.75,-2.48 3.75,2.48, body extent -2.43,-1.75 2.42,1.75, height 1.8
AMPHENOL_10144517-101802LF [mm] "Plug(male)"
  rect 0.5x2 smd: 1(19.6,2.2) 2(19.6,-2.2) 3(18.8,2.2) 4(18.8,-2.2) 5(18,2.2) 6(18,-2.2) 7(17.2,2.2) 8(17.2,-2.2) 9(16.4,2.2) 10(16.4,-2.2) 11(15.6,2.2) 12(15.6,-2.2) 13(14.8,2.2) 14(14.8,-2.2) 15(14,2.2) 16(14,-2.2) 17(13.2,2.2) 18(13.2,-2.2) 19(12.4,2.2) 20(12.4,-2.2) 21(11.6,2.2) 22(11.6,-2.2) 23(10.8,2.2) 24(10.8,-2.2) 25(10,2.2) 26(10,-2.2) 27(9.2,2.2) 28(9.2,-2.2) 29(8.4,2.2) 30(8.4,-2.2) 31(7.6,2.2) 32(7.6,-2.2) 33(6.8,2.2) 34(6.8,-2.2) 35(6,2.2) 36(6,-2.2) 37(5.2,2.2) 38(5.2,-2.2) 39(4.4,2.2) 40(4.4,-2.2) 41(3.6,2.2) 42(3.6,-2.2) 43(2.8,2.2) 44(2.8,-2.2) 45(2,2.2) 46(2,-2.2) 47(1.2,2.2) 48(1.2,-2.2) 49(0.4,2.2) 50(0.4,-2.2) 51(-0.4,2.2) 52(-0.4,-2.2) 53(-1.2,2.2) 54(-1.2,-2.2) 55(-2,2.2) 56(-2,-2.2) 57(-2.8,2.2) 58(-2.8,-2.2) 59(-3.6,2.2) 60(-3.6,-2.2) 61(-4.4,2.2) 62(-4.4,-2.2) 63(-5.2,2.2) 64(-5.2,-2.2) 65(-6,2.2) 66(-6,-2.2) 67(-6.8,2.2) 68(-6.8,-2.2) 69(-7.6,2.2) 70(-7.6,-2.2) 71(-8.4,2.2) 72(-8.4,-2.2) 73(-9.2,2.2) 74(-9.2,-2.2) 75(-10,2.2) 76(-10,-2.2) 77(-10.8,2.2) 78(-10.8,-2.2) 79(-11.6,2.2) 80(-11.6,-2.2) 81(-12.4,2.2) 82(-12.4,-2.2) 83(-13.2,2.2) 84(-13.2,-2.2) 85(-14,2.2) 86(-14,-2.2) 87(-14.8,2.2) 88(-14.8,-2.2) 89(-15.6,2.2) 90(-15.6,-2.2) 91(-16.4,2.2) 92(-16.4,-2.2) 93(-17.2,2.2) 94(-17.2,-2.2) 95(-18,2.2) 96(-18,-2.2) 97(-18.8,2.2) 98(-18.8,-2.2) 99(-19.6,2.2) 100(-19.6,-2.2)
  round 0.83 hole 0.83 unplated: ""(-22.1,0)
  round 1.23 hole 1.23 unplated: ""(22.1,0)
  silkscreen extent -22.9,-3 22.9,3.85, body extent -22.9,-3 22.9,3, height 3.65
CAPC0603(1608)100_L [mil] "Chip Capacitor, Body 1.6x0.8mm, Height 1.0mm, IPC High Density"
  rrect25% 26x29.92 smd: 1(-27.56,0) 2(27.56,0)
  silkscreen extent 0,-12 0,12, body extent -31,-16 31,16, height 37
CAPC0805(2012)145_L [mm] "Chip Capacitor, Body 2.0x1.2mm, Height 1.45mm, IPC High Density"
  rrect25% 0.76x1.3 smd: 1(-0.9,0) 2(0.89,0)
  silkscreen extent -0.3,-0.55 0.3,0.55, body extent -1,-0.6 1,0.6, height 1.45
CAPC1005X56X25LL10T15 [mm] "Chip Capacitor, 2-Leads, Body 1.10x0.60mm, IPC High Density"
  rect 0.58x0.54 smd: 1(-0.39,0) 2(0.39,0)
  body extent -0.55,-0.3 0.55,0.3, height 0.56
CAPC1608X90X40NL10T20 [mm] "Chip Capacitor, 2-Leads, Body 1.70x0.90mm, IPC Medium Density"
  rect 0.95x0.95 smd: 1(-0.625,0) 2(0.625,0)
  body extent -0.85,-0.45 0.85,0.45, height 0.9
CAPC2013X135X45NL10T25 [mm] "Chip Capacitor, 2-Leads, Body 2.10x1.35mm, IPC Medium Density"
  rect 1.2x1.4 smd: 1(-0.85,0) 2(0.85,0)
  body extent -1.05,-0.67 1.05,0.67, height 1.35
CFSH0520LTRPBFREE [mm]
  rect 0.55x0.6 smd: 1(-0.4,0) 2(0.4,0)
  silkscreen extent -1.2,-0.05 -1.1,0.05, body extent -0.5,-0.3 0.5,0.3, height 0.4
CPF0402 [mm]
  rect 0.5x0.6 smd: 1(-0.5,0) 2(0.5,0)
  silkscreen extent -0.98,-0.53 0.98,0.53, body extent -0.55,-0.27 0.55,0.27, height 0.35
D0008B_N [mil]
  oval 55x23.62 smd: 1(-108.5,75) 2(-108.5,25) 3(-108.5,-25) 4(-108.5,-75) 5(108.5,-75) 6(108.5,-25) 7(108.5,25) 8(108.5,75)
  silkscreen extent -130,-98 35,98, body extent -118,-96 118,96, height 64
DBQ0016A_N [mm]
  oval 1.45x0.4 smd: 1(-2.725,2.222) 2(-2.725,1.587) 3(-2.725,0.953) 4(-2.725,0.318) 5(-2.725,-0.318) 6(-2.725,-0.953) 7(-2.725,-1.587) 8(-2.725,-2.222) 9(2.725,-2.222) 10(2.725,-1.587) 11(2.725,-0.953) 12(2.725,-0.318) 13(2.725,0.318) 14(2.725,0.953) 15(2.725,1.587) 16(2.725,2.222)
  silkscreen extent -3.35,-2.5 1.1,2.67, body extent -3.01,-2.45 3.01,2.45, height 1.63
DBV0005A_N [mm]
  rrect17% 1x0.6 smd: 1(-1.375,0.95) 2(-1.375,0) 3(-1.375,-0.95) 4(1.375,-0.95) 5(1.375,0.95)
  silkscreen extent -0.25,-1.55 0.25,1.55, body extent -1.42,-1.46 1.42,1.46, height 1.09
DBV0006A_N [mm]
  rrect17% 1x0.6 smd: 1(-1.375,0.95) 2(-1.375,0) 3(-1.375,-0.95) 4(1.375,-0.95) 5(1.375,0) 6(1.375,0.95)
  silkscreen extent -1.67,-1.55 0.5,1.55, body extent -1.42,-1.46 1.42,1.46, height 1.12
DDC0006A_N [mm]
  rrect17% 1x0.6 smd: 1(-1.375,0.95) 2(-1.375,0) 3(-1.375,-0.95) 4(1.375,-0.95) 5(1.375,0) 6(1.375,0.95)
  silkscreen extent -1.75,-1.52 0.7,1.53, body extent -1.43,-1.48 1.43,1.49, height 0.92
DGK0008A_N [mm]
  oval 1.35x0.45 smd: 1(-2.225,0.975) 2(-2.225,0.325) 3(-2.225,-0.325) 4(-2.225,-0.975) 5(2.225,-0.975) 6(2.225,-0.325) 7(2.225,0.325) 8(2.225,0.975)
  silkscreen extent -2.75,-1.55 0.95,1.55, body extent -2.45,-1.5 2.45,1.5, height 0.96
DRC0010J [mm] "for TPS62420DRCR"
  oval 0.6x0.24 smd paste+0 mask+0.051: 1(-1.4,1) 2(-1.4,0.5) 3(-1.4,0) 4(-1.4,-0.5) 5(-1.4,-1) 6(1.4,-1) 7(1.4,-0.5) 8(1.4,0) 9(1.4,0.5) 10(1.4,1)
  rect 1.65x2.4 smd paste-1.187 mask+0.051: 11(0,0)
  round 0.5 / inner round 1.524 / far side round 0.5 hole 0.203 paste-2539.97 mask+0.051: V(-0.575,0) V(0,-0.95) V(0,0.95) V(0.575,0)
  Top Layer region: -0.135,1.1 -0.135,1.5 -0.365,1.5 -0.365,1.1
  Top Layer region: 0.135,1.5 0.135,1.1 0.365,1.1 0.365,1.5
  Top Layer region: -0.135,-1.5 -0.135,-1.1 -0.365,-1.1 -0.365,-1.5
  Top Layer region: 0.135,-1.1 0.135,-1.5 0.365,-1.5 0.365,-1.1
  silkscreen extent -1.7,-1.7 1.7,1.7
DRL0005A [mm]
  rrect33% 0.67x0.3 smd: 1(-0.74,0.5) 2(-0.74,0) 3(-0.74,-0.5) 4(0.74,-0.5) 5(0.74,0.5)
  silkscreen extent -0.9,-0.95 0.5,0.95, body extent -0.85,-0.85 0.85,0.85, height 0.62
ECS_ECS-2520S [mm]
  rrect12% 0.8x0.9 smd: 1(-0.725,0.925) 2(-0.725,-0.925) 3(0.725,-0.925) 4(0.725,0.925)
  silkscreen extent -1.7,0.9 -1.5,1.1, body extent -1.05,-1.3 1.05,1.3, height 1
ECS_ECX-53B [mm]
  rect 1.25x1.6 smd: 1(-1.1,1.85) 2(-1.1,-1.85) 3(1.1,-1.85) 4(1.1,1.85)
  silkscreen extent -2.05,-2.7 1.82,2.73, body extent -1.7,-2.6 1.7,2.6, height 0.86
INDC2520X100X60NL20T20 [mm] "Chip Inductor, 2-Leads, Body 2.7x2.2mm, IPC Medium Density"
  rect 1.23x2.22 smd: 1(-1.085,0) 2(1.085,0)
  silkscreen extent -0.1,-1.01 0.1,1.01, body extent -1.35,-1.1 1.35,1.1, height 1
KSTN-5003 [mm] "Test Point, Through Hole, Dia 2.54mm"
  round 1.5 hole 1: 1(0,0)
  silkscreen extent -1.27,-1.27 1.27,1.27, body extent -1.27,-1.27 1.27,1.27, height 4.57
LEDC2012X70N [mm]
  rect 0.9x1.4 smd: 1(-0.95,0) 2(0.95,0)
  silkscreen extent -1.75,-1.05 0.95,1.05, body extent -1,0 1,0.7, height 0.5
LQFP64_N [mm]
  oval 1.8x0.3 smd: 1(-5.55,3.75) 2(-5.55,3.25) 3(-5.55,2.75) 4(-5.55,2.25) 5(-5.55,1.75) 6(-5.55,1.25) 7(-5.55,0.75) 8(-5.55,0.25) 9(-5.55,-0.25) 10(-5.55,-0.75) 11(-5.55,-1.25) 12(-5.55,-1.75) 13(-5.55,-2.25) 14(-5.55,-2.75) 15(-5.55,-3.25) 16(-5.55,-3.75) 33(5.55,-3.75) 34(5.55,-3.25) 35(5.55,-2.75) 36(5.55,-2.25) 37(5.55,-1.75) 38(5.55,-1.25) 39(5.55,-0.75) 40(5.55,-0.25) 41(5.55,0.25) 42(5.55,0.75) 43(5.55,1.25) 44(5.55,1.75) 45(5.55,2.25) 46(5.55,2.75) 47(5.55,3.25) 48(5.55,3.75)
  oval 0.3x1.8 smd: 17(-3.75,-5.55) 18(-3.25,-5.55) 19(-2.75,-5.55) 20(-2.25,-5.55) 21(-1.75,-5.55) 22(-1.25,-5.55) 23(-0.75,-5.55) 24(-0.25,-5.55) 25(0.25,-5.55) 26(0.75,-5.55) 27(1.25,-5.55) 28(1.75,-5.55) 29(2.25,-5.55) 30(2.75,-5.55) 31(3.25,-5.55) 32(3.75,-5.55) 49(3.75,5.55) 50(3.25,5.55) 51(2.75,5.55) 52(2.25,5.55) 53(1.75,5.55) 54(1.25,5.55) 55(0.75,5.55) 56(0.25,5.55) 57(-0.25,5.55) 58(-0.75,5.55) 59(-1.25,5.55) 60(-1.75,5.55) 61(-2.25,5.55) 62(-2.75,5.55) 63(-3.25,5.55) 64(-3.75,5.55)
  silkscreen extent -5.67,-4.25 4.25,4.57, body extent -5,-5 5,5, height 1.6
MURA-BLM18-F-H1-CHIP-2_V [mm] "Chip Ferrite Bead, 2-Leads, Body 1.6x0.8mm, Height 0.95mm, Flow"
  rect 0.95x0.7 smd: 1(-0.825,0) 2(0.825,0)
  body extent -0.87,-0.48 0.87,0.48, height 0.95
NCP606MN18T2G [mm]
  rect 0.5x0.83 smd: 1(-0.95,-1.385) 2(0,-1.385) 3(0.95,-1.385) 4(0.95,1.385) 5(0,1.385) 6(-0.95,1.385)
  rect 2.15x1.35 smd: 7(0,0)
  silkscreen extent -1.5,-2.3 1.5,0.6, body extent -1.5,-1.65 1.5,1.65, height 1.1
POWERMITE [mil]
  rect 105x100 smd: 1(-46,0)
  rect 30x50 smd: 2(46,0)
  silkscreen extent -124,-63 61,63, body extent -94,-40 59,40, height 45
PW0008A_N [mm]
  oval 1.4x0.45 smd: 1(-2.95,0.975) 2(-2.95,0.325) 3(-2.95,-0.325) 4(-2.95,-0.975) 5(2.95,-0.975) 6(2.95,-0.325) 7(2.95,0.325) 8(2.95,0.975)
  silkscreen extent -3.4,-1.55 1.85,1.55, body extent -3.21,-1.5 3.21,1.5, height 1.2
PW0020A_N [mm]
  oval 1.4x0.45 smd: 1(-2.95,2.925) 2(-2.95,2.275) 3(-2.95,1.625) 4(-2.95,0.975) 5(-2.95,0.325) 6(-2.95,-0.325) 7(-2.95,-0.975) 8(-2.95,-1.625) 9(-2.95,-2.275) 10(-2.95,-2.925) 11(2.95,-2.925) 12(2.95,-2.275) 13(2.95,-1.625) 14(2.95,-0.975) 15(2.95,-0.325) 16(2.95,0.325) 17(2.95,0.975) 18(2.95,1.625) 19(2.95,2.275) 20(2.95,2.925)
  Top Overlay keep-out lines w0.2: -1.85,-3.3 1.85,-3.3
  silkscreen extent -3.5,-3.3 1.85,3.4, body extent -3.21,-3.25 3.21,3.25, height 1
RESC0402(1005)_L [mm] "Chip Resistor, Body 1.0x0.5mm, IPC High Density"
  rrect25% 0.5x0.55 smd: 1(-0.45,0) 2(0.45,0)
  silkscreen extent 0,-0.2 0,0.2, body extent -0.5,-0.25 0.5,0.25, height 0.3
RESC0805(2012)_L [mm] "Chip Resistor, Body 2.0x1.3mm, IPC High Density"
  rrect25% 0.76x1.3 smd: 1(-0.9,0) 2(0.89,0)
  silkscreen extent -0.3,-0.55 0.3,0.55, body extent -1,-0.62 1,0.63, height 0.6
RESC1005X40X25ML05T05 [mm] "Chip Resistor, 2-Leads, Body 1.05x0.55mm, IPC Low Density"
  rect 0.65x0.65 smd: 1(-0.5,0) 2(0.5,0)
  body extent -0.53,-0.28 0.53,0.28, height 0.4
RESC1608X55X25ML10T15 [mm] "Chip Resistor, 2-Leads, Body 1.70x0.90mm, IPC Low Density"
  rect 0.8x1 smd: 1(-0.75,0) 2(0.75,0)
  body extent -0.85,-0.45 0.85,0.45, height 0.55
RHB0032B [mm]
  rrect40% 0.6x0.25 smd: 1(-2.4,1.75) 2(-2.4,1.25) 3(-2.4,0.75) 4(-2.4,0.25) 5(-2.4,-0.25) 6(-2.4,-0.75) 7(-2.4,-1.25) 8(-2.4,-1.75) 17(2.4,-1.75) 18(2.4,-1.25) 19(2.4,-0.75) 20(2.4,-0.25) 21(2.4,0.25) 22(2.4,0.75) 23(2.4,1.25) 24(2.4,1.75)
  rrect40% 0.25x0.6 smd: 9(-1.75,-2.4) 10(-1.25,-2.4) 11(-0.75,-2.4) 12(-0.25,-2.4) 13(0.25,-2.4) 14(0.75,-2.4) 15(1.25,-2.4) 16(1.75,-2.4) 25(1.75,2.4) 26(1.25,2.4) 27(0.75,2.4) 28(0.25,2.4) 29(-0.25,2.4) 30(-0.75,2.4) 31(-1.25,2.4) 32(-1.75,2.4)
  rrect50% 1.27x1.27 on Top Paste: 33(-0.735,0.735) 33(-0.735,-0.735) 33(0.735,0.735) 33(0.735,-0.735)
  rrect3% 2.9x2.9 smd paste-1.725: 33(0,0)
  silkscreen extent -2.72,-2.72 2.72,2.72, body extent -2.57,-2.57 2.58,2.58, height 1.01
SHDR10W66P254_2X5_2030X905X905P [mm]
  rect 1.725x1.725 hole 1.15: 1(0,0)
  round 1.725 hole 1.15: 2(0,2.54) 3(2.54,0) 4(2.54,2.54) 5(5.08,0) 6(5.08,2.54) 7(7.62,0) 8(7.62,2.54) 9(10.16,0) 10(10.16,2.54)
  silkscreen extent -5.07,-3.13 15.53,5.92, body extent -5.07,-3.25 15.23,5.79, height 9.05
SOIC-8 [mm]
  rrect17% 1.45x0.6 smd: 1(-2.725,1.905) 2(-2.725,0.635) 3(-2.725,-0.635) 4(-2.725,-1.905) 5(2.725,-1.905) 6(2.725,-0.635) 7(2.725,0.635) 8(2.725,1.905)
  silkscreen extent -3.5,-2.5 0.9,2.5, body extent -3,-2.45 3,2.45, height 1.63
SOP50P810X120-48N [mm]
  rect 1.475x0.3 smd: 1(-3.788,5.75) 2(-3.788,5.25) 3(-3.788,4.75) 4(-3.788,4.25) 5(-3.788,3.75) 6(-3.788,3.25) 7(-3.788,2.75) 8(-3.788,2.25) 9(-3.788,1.75) 10(-3.788,1.25) 11(-3.788,0.75) 12(-3.788,0.25) 13(-3.788,-0.25) 14(-3.788,-0.75) 15(-3.788,-1.25) 16(-3.788,-1.75) 17(-3.788,-2.25) 18(-3.788,-2.75) 19(-3.788,-3.25) 20(-3.788,-3.75) 21(-3.788,-4.25) 22(-3.788,-4.75) 23(-3.788,-5.25) 24(-3.788,-5.75) 25(3.788,-5.75) 26(3.788,-5.25) 27(3.788,-4.75) 28(3.788,-4.25) 29(3.788,-3.75) 30(3.788,-3.25) 31(3.788,-2.75) 32(3.788,-2.25) 33(3.788,-1.75) 34(3.788,-1.25) 35(3.788,-0.75) 36(3.788,-0.25) 37(3.788,0.25) 38(3.788,0.75) 39(3.788,1.25) 40(3.788,1.75) 41(3.788,2.25) 42(3.788,2.75) 43(3.788,3.25) 44(3.788,3.75) 45(3.788,4.25) 46(3.788,4.75) 47(3.788,5.25) 48(3.788,5.75)
  silkscreen extent -4.53,-6.25 2.7,6.25, body extent -4.06,-6.25 4.06,6.25, height 1.1